# EAGLE board Qwiic_Spectral_Sensor_AS7341-Panel (EAGLE 9.6.2), part 1 of 3
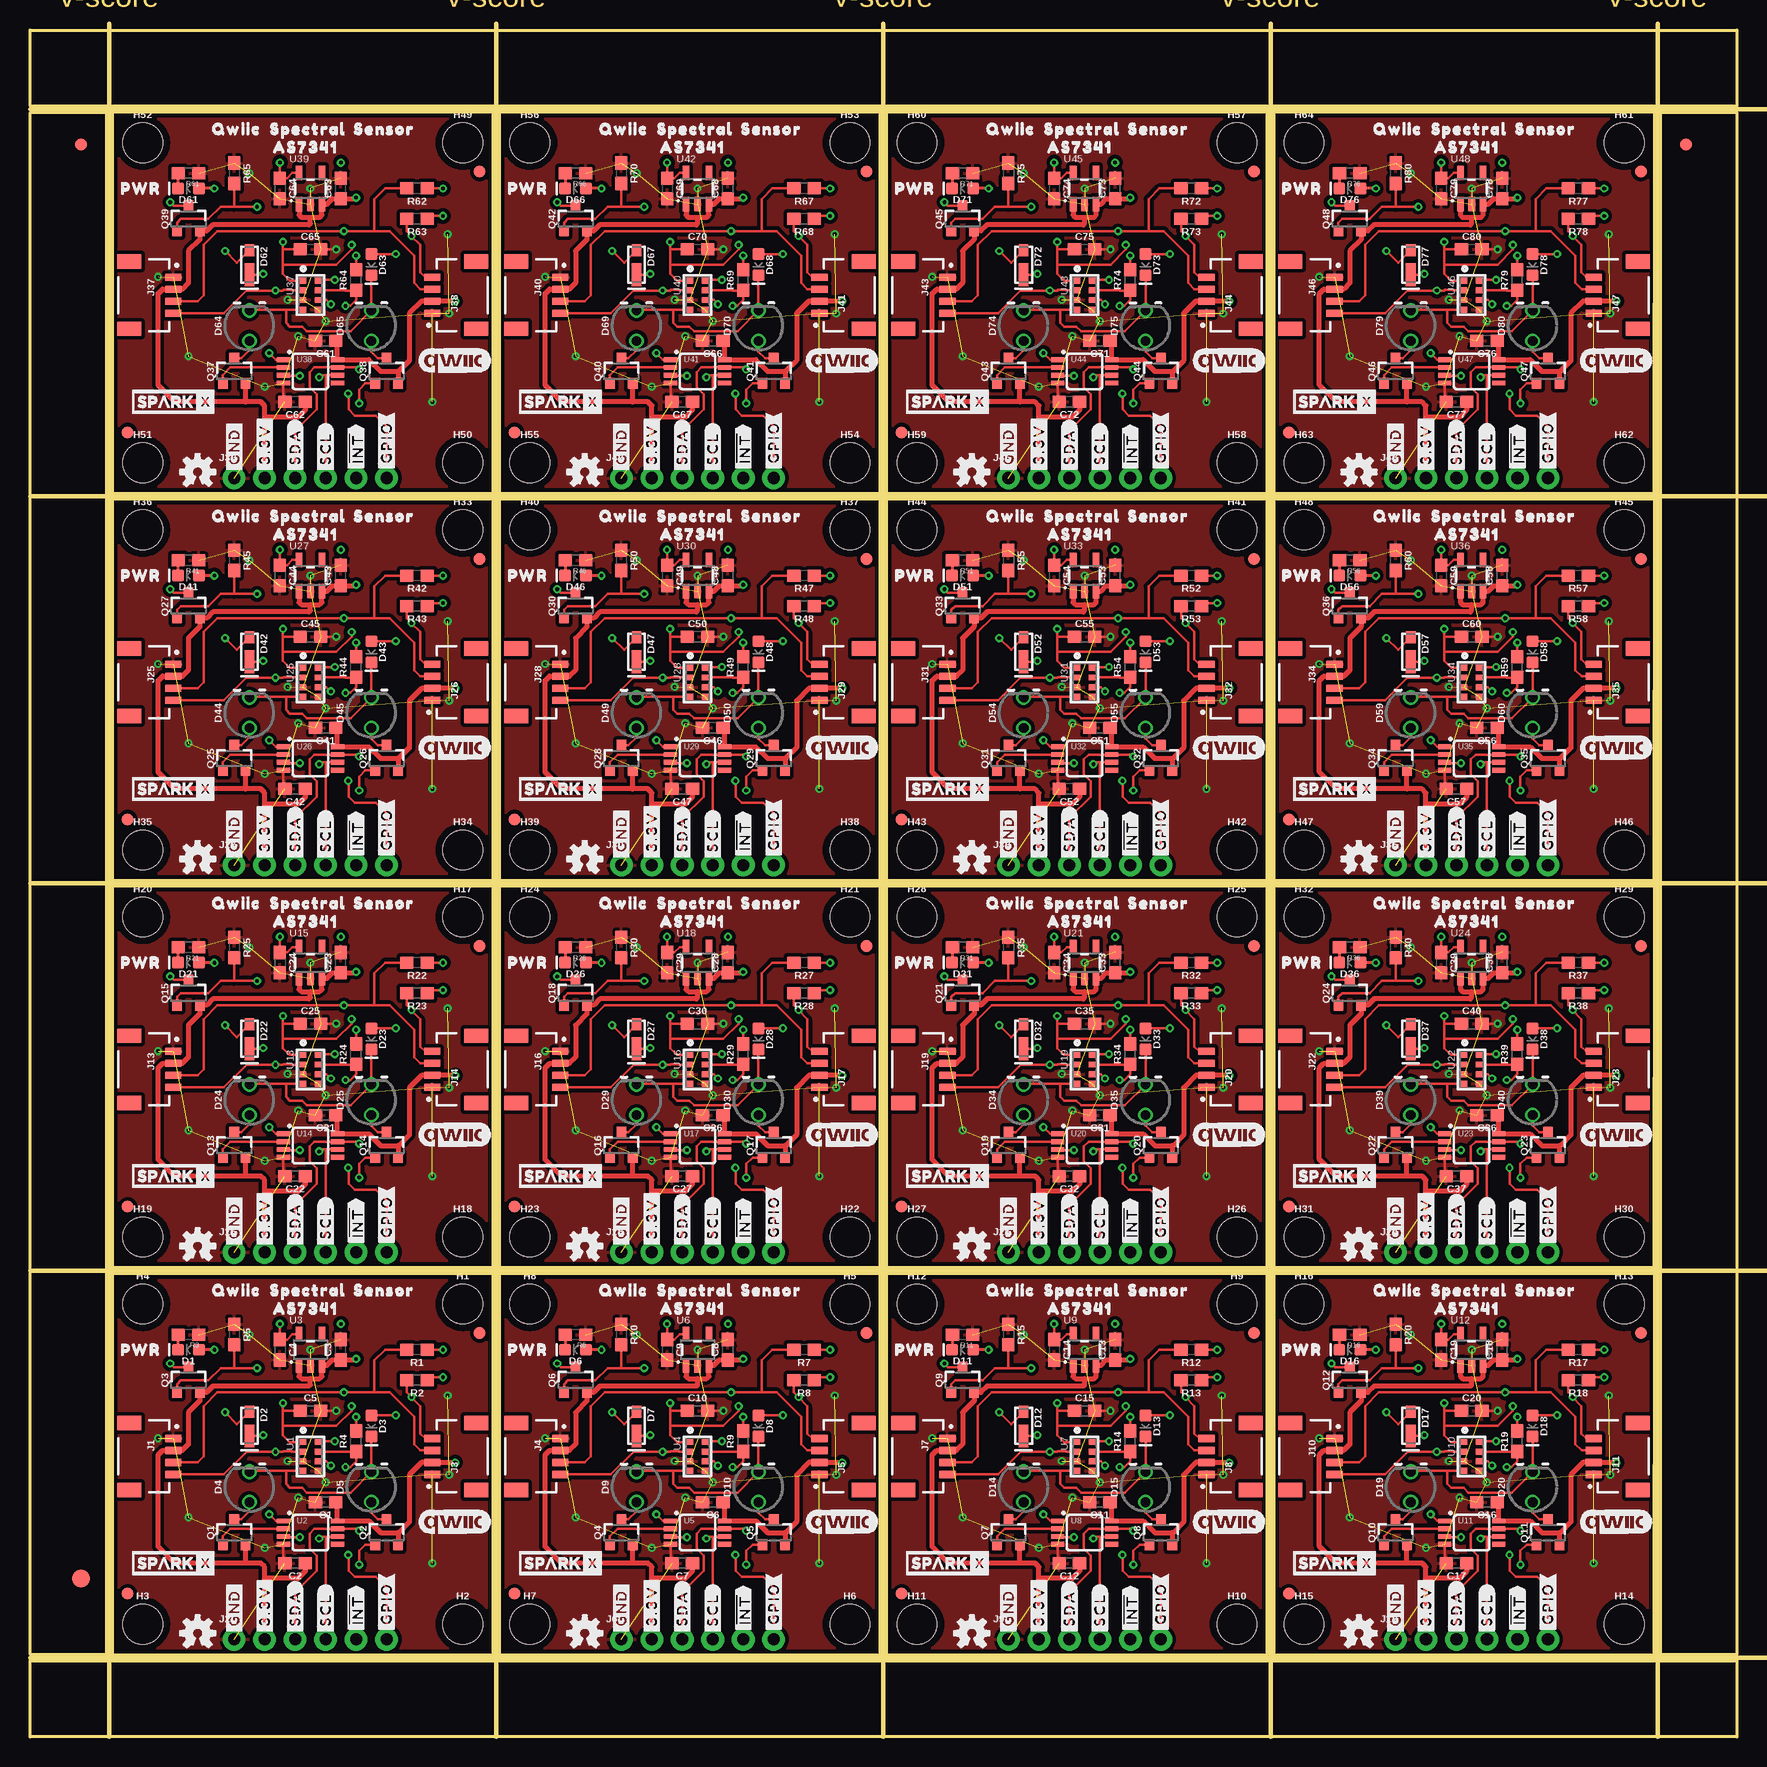
[diagram p0: board, top side]
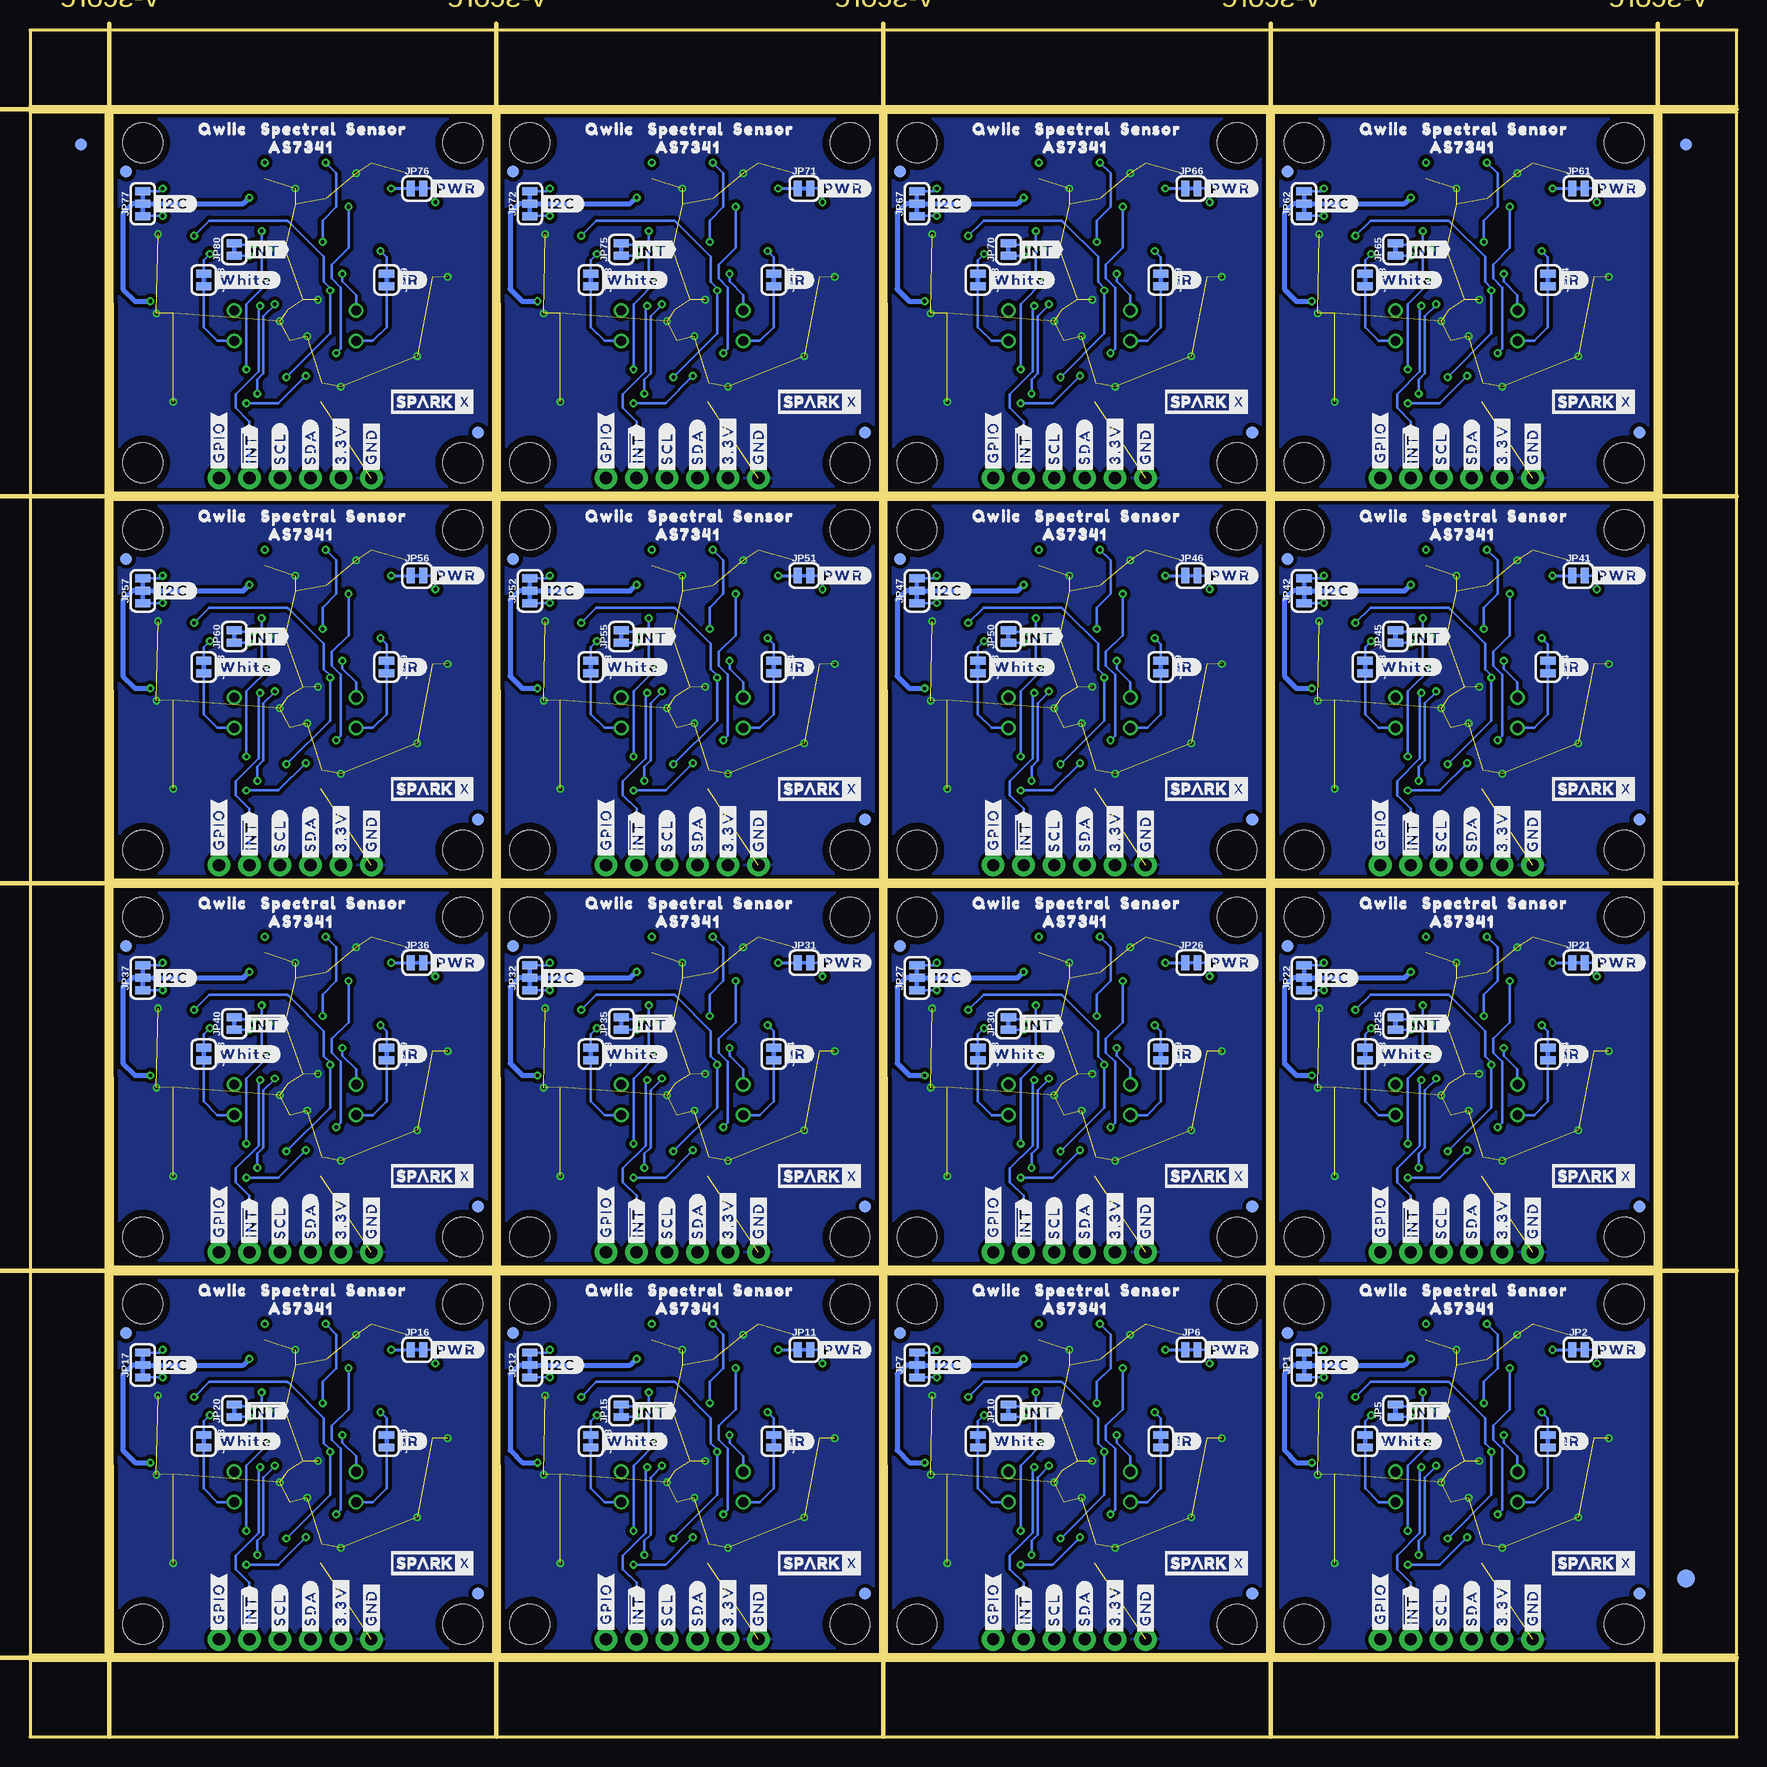
[diagram p1: board, bottom side, seen from below]

Size 142.24 x 142.24 mm. Coordinates in mm from the lower left corner, seen from the top.
Outline: 6.86,6.86 38.59,6.86 38.61,38.61 6.86,38.61 6.86,6.86
Outline: 39.12,6.86 70.85,6.86 70.87,38.61 39.12,38.61 39.12,6.86
Outline: 71.37,6.86 103.1,6.86 103.12,38.61 71.37,38.61 71.37,6.86
Outline: 103.63,6.86 135.36,6.86 135.38,38.61 103.63,38.61 103.63,6.86
Outline: 6.86,39.12 38.59,39.12 38.61,70.87 6.86,70.87 6.86,39.12
Outline: 39.12,39.12 70.85,39.12 70.87,70.87 39.12,70.87 39.12,39.12
Outline: 71.37,39.12 103.1,39.12 103.12,70.87 71.37,70.87 71.37,39.12
Outline: 103.63,39.12 135.36,39.12 135.38,70.87 103.63,70.87 103.63,39.12
Outline: 6.86,71.37 38.59,71.37 38.61,103.12 6.86,103.12 6.86,71.37
Outline: 39.12,71.37 70.85,71.37 70.87,103.12 39.12,103.12 39.12,71.37
Outline: 71.37,71.37 103.1,71.37 103.12,103.12 71.37,103.12 71.37,71.37
Outline: 103.63,71.37 135.36,71.37 135.38,103.12 103.63,103.12 103.63,71.37
Outline: 6.86,103.63 38.59,103.63 38.61,135.38 6.86,135.38 6.86,103.63
Outline: 39.12,103.63 70.85,103.63 70.87,135.38 39.12,135.38 39.12,103.63
Outline: 71.37,103.63 103.1,103.63 103.12,135.38 71.37,135.38 71.37,103.63
Outline: 103.63,103.63 135.36,103.63 135.38,135.38 103.63,135.38 103.63,103.63
Outline: 0,6.35 142.24,6.35 142.24,0 0,0 0,6.35
Outline: 135.89,135.38 142.24,135.38 142.24,6.86 135.89,6.86 135.89,135.38
Outline: 0,142.24 142.24,142.24 142.24,135.89 0,135.89 0,142.24
Outline: 0,135.38 6.35,135.38 6.35,6.86 0,6.86 0,135.38
Copper layers (1*16): Top 0.035mm / dielectric 1.5mm / Bottom 0.035mm
Design rules "Qwiic_Spectral_Sensor_AS7341": minimum track width 7mil, minimum drill 12mil, track to track 7mil, track to pad 7mil, pad to pad 7mil, via to via 7mil, smd to smd 7mil, copper to edge 7mil, drill to drill 7mil, minimum pad ring 7mil, minimum via ring 7mil, stop-mask expansion 4mil, vias tented up to drill 25mil, thermal gap 10mil
Milling: 10 lines

## Footprints (pad centres in the part's own frame; a part is rotated, then mirrored left to right if it is on the bottom)
0603 = smd 1.1 x 1: 1 -0.85,0; 2 0.85,0
LED-0603 = smd 1 x 1: A -0.877,0; C 0.877,0
SUPER_BRIGHT_SMD_LED_3014 = smd 1 x 0.8: A -1.2,0 | smd 1.9 x 0.8: C 0.827,0
LED_3MM-NS = drill 0.813: A -1.27,0; K 1.27,0
FIDUCIAL-1X2 = smd 1 x 1: 1 0,0
FIDUCIAL-1.5X3 = smd 1.5 x 1.5: 1 0,0
STAND-OFF = hole 3.302: 0,0
JST04_1MM_RA = smd 0.6 x 1.35: 1 -1.5,0; 2 -0.5,0; 3 0.5,0; 4 1.5,0 | smd 1.2 x 2: NC1 2.8,-3.675; NC2 -2.8,-3.675
1X06_NO_SILK = drill 1.016 pad 1.88: 1 0,0; 2 2.54,0; 3 5.08,0; 4 7.62,0; 5 10.16,0; 6 12.7,0
SMT-JUMPER_3_2-NC_TRACE_SILK = smd 0.66 x 1.27: 1 -1.041,0; 2 0,0; 3 1.041,0
SMT-JUMPER_2_NC_TRACE_SILK = smd 0.66 x 1.27: 1 -0.521,0; 2 0.521,0
SOT23-3 = smd 0.8 x 0.9: 1 -0.95,-1; 2 0.95,-1; 3 0,1.1
OLGA8 = smd 0.488 x 0.575: 1 -1.2,-0.638; 2 -0.4,-0.638; 3 0.4,-0.638; 4 1.2,-0.638; 5 1.2,0.638; 6 0.4,0.638; 7 -0.4,0.638; 8 -1.2,0.638
MSOP8 = smd 1.1 x 0.4: 1 -2.25,0.975; 2 -2.25,0.325; 3 -2.25,-0.325; 4 -2.25,-0.975; 5 2.25,-0.975; 6 2.25,-0.325; 7 2.25,0.325; 8 2.25,0.975
SOT23-5 = smd 0.55 x 1.2: 1 -0.95,-1.3; 2 0,-1.3; 3 0.95,-1.3; 4 0.95,1.3; 5 -0.95,1.3

## Placement (x,y rotation side)
C1  10uF  [0603]  24.64,19.56 180 top
C2  0.1uF  [0603]  22.1,14.48 180 top
C3  1.0uF  [0603]  25.91,32.26 90 top
C4  1.0uF  [0603]  20.83,32.26 270 top
C5  0.1uF  [0603]  23.37,27.18 0 top
C6  10uF  [0603]  56.9,19.56 180 top
C7  0.1uF  [0603]  54.36,14.48 180 top
C8  1.0uF  [0603]  58.17,32.26 90 top
C9  1.0uF  [0603]  53.09,32.26 270 top
C10  0.1uF  [0603]  55.63,27.18 0 top
C11  10uF  [0603]  89.15,19.56 180 top
C12  0.1uF  [0603]  86.61,14.48 180 top
C13  1.0uF  [0603]  90.42,32.26 90 top
C14  1.0uF  [0603]  85.34,32.26 270 top
C15  0.1uF  [0603]  87.88,27.18 0 top
C16  10uF  [0603]  121.41,19.56 180 top
C17  0.1uF  [0603]  118.87,14.48 180 top
C18  1.0uF  [0603]  122.68,32.26 90 top
C19  1.0uF  [0603]  117.6,32.26 270 top
C20  0.1uF  [0603]  120.14,27.18 0 top
C21  10uF  [0603]  24.64,51.82 180 top
C22  0.1uF  [0603]  22.1,46.74 180 top
C23  1.0uF  [0603]  25.91,64.52 90 top
C24  1.0uF  [0603]  20.83,64.52 270 top
C25  0.1uF  [0603]  23.37,59.44 0 top
C26  10uF  [0603]  56.9,51.82 180 top
C27  0.1uF  [0603]  54.36,46.74 180 top
C28  1.0uF  [0603]  58.17,64.52 90 top
C29  1.0uF  [0603]  53.09,64.52 270 top
C30  0.1uF  [0603]  55.63,59.44 0 top
C31  10uF  [0603]  89.15,51.82 180 top
C32  0.1uF  [0603]  86.61,46.74 180 top
C33  1.0uF  [0603]  90.42,64.52 90 top
C34  1.0uF  [0603]  85.34,64.52 270 top
C35  0.1uF  [0603]  87.88,59.44 0 top
C36  10uF  [0603]  121.41,51.82 180 top
C37  0.1uF  [0603]  118.87,46.74 180 top
C38  1.0uF  [0603]  122.68,64.52 90 top
C39  1.0uF  [0603]  117.6,64.52 270 top
C40  0.1uF  [0603]  120.14,59.44 0 top
C41  10uF  [0603]  24.64,84.07 180 top
C42  0.1uF  [0603]  22.1,78.99 180 top
C43  1.0uF  [0603]  25.91,96.77 90 top
C44  1.0uF  [0603]  20.83,96.77 270 top
C45  0.1uF  [0603]  23.37,91.69 0 top
C46  10uF  [0603]  56.9,84.07 180 top
C47  0.1uF  [0603]  54.36,78.99 180 top
C48  1.0uF  [0603]  58.17,96.77 90 top
C49  1.0uF  [0603]  53.09,96.77 270 top
C50  0.1uF  [0603]  55.63,91.69 0 top
C51  10uF  [0603]  89.15,84.07 180 top
C52  0.1uF  [0603]  86.61,78.99 180 top
C53  1.0uF  [0603]  90.42,96.77 90 top
C54  1.0uF  [0603]  85.34,96.77 270 top
C55  0.1uF  [0603]  87.88,91.69 0 top
C56  10uF  [0603]  121.41,84.07 180 top
C57  0.1uF  [0603]  118.87,78.99 180 top
C58  1.0uF  [0603]  122.68,96.77 90 top
C59  1.0uF  [0603]  117.6,96.77 270 top
C60  0.1uF  [0603]  120.14,91.69 0 top
C61  10uF  [0603]  24.64,116.33 180 top
C62  0.1uF  [0603]  22.1,111.25 180 top
C63  1.0uF  [0603]  25.91,129.03 90 top
C64  1.0uF  [0603]  20.83,129.03 270 top
C65  0.1uF  [0603]  23.37,123.95 0 top
C66  10uF  [0603]  56.9,116.33 180 top
C67  0.1uF  [0603]  54.36,111.25 180 top
C68  1.0uF  [0603]  58.17,129.03 90 top
C69  1.0uF  [0603]  53.09,129.03 270 top
C70  0.1uF  [0603]  55.63,123.95 0 top
C71  10uF  [0603]  89.15,116.33 180 top
C72  0.1uF  [0603]  86.61,111.25 180 top
C73  1.0uF  [0603]  90.42,129.03 90 top
C74  1.0uF  [0603]  85.34,129.03 270 top
C75  0.1uF  [0603]  87.88,123.95 0 top
C76  10uF  [0603]  121.41,116.33 180 top
C77  0.1uF  [0603]  118.87,111.25 180 top
C78  1.0uF  [0603]  122.68,129.03 90 top
C79  1.0uF  [0603]  117.6,129.03 270 top
C80  0.1uF  [0603]  120.14,123.95 0 top
D1  RED  [LED-0603]  13.21,32.26 180 top
D2  White, 60mA  [SUPER_BRIGHT_SMD_LED_3014]  18.29,25.91 270 top
D3  LED-IR0603  [LED-0603]  28.45,25.91 270 top
D4  [LED_3MM-NS]  18.29,20.83 90 top
D5  [LED_3MM-NS]  28.45,20.83 90 top
D6  RED  [LED-0603]  45.47,32.26 180 top
D7  White, 60mA  [SUPER_BRIGHT_SMD_LED_3014]  50.55,25.91 270 top
D8  LED-IR0603  [LED-0603]  60.71,25.91 270 top
D9  [LED_3MM-NS]  50.55,20.83 90 top
D10  [LED_3MM-NS]  60.71,20.83 90 top
D11  RED  [LED-0603]  77.72,32.26 180 top
D12  White, 60mA  [SUPER_BRIGHT_SMD_LED_3014]  82.8,25.91 270 top
D13  LED-IR0603  [LED-0603]  92.96,25.91 270 top
D14  [LED_3MM-NS]  82.8,20.83 90 top
D15  [LED_3MM-NS]  92.96,20.83 90 top
D16  RED  [LED-0603]  109.98,32.26 180 top
D17  White, 60mA  [SUPER_BRIGHT_SMD_LED_3014]  115.06,25.91 270 top
D18  LED-IR0603  [LED-0603]  125.22,25.91 270 top
D19  [LED_3MM-NS]  115.06,20.83 90 top
D20  [LED_3MM-NS]  125.22,20.83 90 top
D21  RED  [LED-0603]  13.21,64.52 180 top
D22  White, 60mA  [SUPER_BRIGHT_SMD_LED_3014]  18.29,58.17 270 top
D23  LED-IR0603  [LED-0603]  28.45,58.17 270 top
D24  [LED_3MM-NS]  18.29,53.09 90 top
D25  [LED_3MM-NS]  28.45,53.09 90 top
D26  RED  [LED-0603]  45.47,64.52 180 top
D27  White, 60mA  [SUPER_BRIGHT_SMD_LED_3014]  50.55,58.17 270 top
D28  LED-IR0603  [LED-0603]  60.71,58.17 270 top
D29  [LED_3MM-NS]  50.55,53.09 90 top
D30  [LED_3MM-NS]  60.71,53.09 90 top
D31  RED  [LED-0603]  77.72,64.52 180 top
D32  White, 60mA  [SUPER_BRIGHT_SMD_LED_3014]  82.8,58.17 270 top
D33  LED-IR0603  [LED-0603]  92.96,58.17 270 top
D34  [LED_3MM-NS]  82.8,53.09 90 top
D35  [LED_3MM-NS]  92.96,53.09 90 top
D36  RED  [LED-0603]  109.98,64.52 180 top
D37  White, 60mA  [SUPER_BRIGHT_SMD_LED_3014]  115.06,58.17 270 top
D38  LED-IR0603  [LED-0603]  125.22,58.17 270 top
D39  [LED_3MM-NS]  115.06,53.09 90 top
D40  [LED_3MM-NS]  125.22,53.09 90 top
D41  RED  [LED-0603]  13.21,96.77 180 top
D42  White, 60mA  [SUPER_BRIGHT_SMD_LED_3014]  18.29,90.42 270 top
D43  LED-IR0603  [LED-0603]  28.45,90.42 270 top
D44  [LED_3MM-NS]  18.29,85.34 90 top
D45  [LED_3MM-NS]  28.45,85.34 90 top
D46  RED  [LED-0603]  45.47,96.77 180 top
D47  White, 60mA  [SUPER_BRIGHT_SMD_LED_3014]  50.55,90.42 270 top
D48  LED-IR0603  [LED-0603]  60.71,90.42 270 top
D49  [LED_3MM-NS]  50.55,85.34 90 top
D50  [LED_3MM-NS]  60.71,85.34 90 top
D51  RED  [LED-0603]  77.72,96.77 180 top
D52  White, 60mA  [SUPER_BRIGHT_SMD_LED_3014]  82.8,90.42 270 top
D53  LED-IR0603  [LED-0603]  92.96,90.42 270 top
D54  [LED_3MM-NS]  82.8,85.34 90 top
D55  [LED_3MM-NS]  92.96,85.34 90 top
D56  RED  [LED-0603]  109.98,96.77 180 top
D57  White, 60mA  [SUPER_BRIGHT_SMD_LED_3014]  115.06,90.42 270 top
D58  LED-IR0603  [LED-0603]  125.22,90.42 270 top
D59  [LED_3MM-NS]  115.06,85.34 90 top
D60  [LED_3MM-NS]  125.22,85.34 90 top
D61  RED  [LED-0603]  13.21,129.03 180 top
D62  White, 60mA  [SUPER_BRIGHT_SMD_LED_3014]  18.29,122.68 270 top
D63  LED-IR0603  [LED-0603]  28.45,122.68 270 top
D64  [LED_3MM-NS]  18.29,117.6 90 top
D65  [LED_3MM-NS]  28.45,117.6 90 top
D66  RED  [LED-0603]  45.47,129.03 180 top
D67  White, 60mA  [SUPER_BRIGHT_SMD_LED_3014]  50.55,122.68 270 top
D68  LED-IR0603  [LED-0603]  60.71,122.68 270 top
D69  [LED_3MM-NS]  50.55,117.6 90 top
D70  [LED_3MM-NS]  60.71,117.6 90 top
D71  RED  [LED-0603]  77.72,129.03 180 top
D72  White, 60mA  [SUPER_BRIGHT_SMD_LED_3014]  82.8,122.68 270 top
D73  LED-IR0603  [LED-0603]  92.96,122.68 270 top
D74  [LED_3MM-NS]  82.8,117.6 90 top
D75  [LED_3MM-NS]  92.96,117.6 90 top
D76  RED  [LED-0603]  109.98,129.03 180 top
D77  White, 60mA  [SUPER_BRIGHT_SMD_LED_3014]  115.06,122.68 270 top
D78  LED-IR0603  [LED-0603]  125.22,122.68 270 top
D79  [LED_3MM-NS]  115.06,117.6 90 top
D80  [LED_3MM-NS]  125.22,117.6 90 top
E$1  [FIDUCIAL-1X2]  4.23,132.72 0 top
E$2  [FIDUCIAL-1X2]  4.23,132.72 0 bottom
E$3  [FIDUCIAL-1X2]  138.01,132.72 0 top
E$4  [FIDUCIAL-1X2]  138.01,132.72 0 bottom
E$5  [FIDUCIAL-1.5X3]  4.23,13.21 0 top
E$6  [FIDUCIAL-1.5X3]  4.23,13.21 0 bottom
FD1  FIDUCIAL1X2  [FIDUCIAL-1X2]  8.13,11.94 0 top
FD2  FIDUCIAL1X2  [FIDUCIAL-1X2]  37.46,33.66 0 top
FD3  FIDUCIAL1X2  [FIDUCIAL-1X2]  8.13,11.94 0 bottom
FD4  FIDUCIAL1X2  [FIDUCIAL-1X2]  37.46,33.66 0 bottom
FD5  FIDUCIAL1X2  [FIDUCIAL-1X2]  40.39,11.94 0 top
FD6  FIDUCIAL1X2  [FIDUCIAL-1X2]  69.72,33.66 0 top
FD7  FIDUCIAL1X2  [FIDUCIAL-1X2]  40.39,11.94 0 bottom
FD8  FIDUCIAL1X2  [FIDUCIAL-1X2]  69.72,33.66 0 bottom
FD9  FIDUCIAL1X2  [FIDUCIAL-1X2]  72.64,11.94 0 top
FD10  FIDUCIAL1X2  [FIDUCIAL-1X2]  101.98,33.66 0 top
FD11  FIDUCIAL1X2  [FIDUCIAL-1X2]  72.64,11.94 0 bottom
FD12  FIDUCIAL1X2  [FIDUCIAL-1X2]  101.98,33.66 0 bottom
FD13  FIDUCIAL1X2  [FIDUCIAL-1X2]  104.9,11.94 0 top
FD14  FIDUCIAL1X2  [FIDUCIAL-1X2]  134.24,33.66 0 top
FD15  FIDUCIAL1X2  [FIDUCIAL-1X2]  104.9,11.94 0 bottom
FD16  FIDUCIAL1X2  [FIDUCIAL-1X2]  134.24,33.66 0 bottom
FD17  FIDUCIAL1X2  [FIDUCIAL-1X2]  8.13,44.2 0 top
FD18  FIDUCIAL1X2  [FIDUCIAL-1X2]  37.46,65.91 0 top
FD19  FIDUCIAL1X2  [FIDUCIAL-1X2]  8.13,44.2 0 bottom
FD20  FIDUCIAL1X2  [FIDUCIAL-1X2]  37.46,65.91 0 bottom
FD21  FIDUCIAL1X2  [FIDUCIAL-1X2]  40.39,44.2 0 top
FD22  FIDUCIAL1X2  [FIDUCIAL-1X2]  69.72,65.91 0 top
FD23  FIDUCIAL1X2  [FIDUCIAL-1X2]  40.39,44.2 0 bottom
FD24  FIDUCIAL1X2  [FIDUCIAL-1X2]  69.72,65.91 0 bottom
FD25  FIDUCIAL1X2  [FIDUCIAL-1X2]  72.64,44.2 0 top
FD26  FIDUCIAL1X2  [FIDUCIAL-1X2]  101.98,65.91 0 top
FD27  FIDUCIAL1X2  [FIDUCIAL-1X2]  72.64,44.2 0 bottom
FD28  FIDUCIAL1X2  [FIDUCIAL-1X2]  101.98,65.91 0 bottom
FD29  FIDUCIAL1X2  [FIDUCIAL-1X2]  104.9,44.2 0 top
FD30  FIDUCIAL1X2  [FIDUCIAL-1X2]  134.24,65.91 0 top
FD31  FIDUCIAL1X2  [FIDUCIAL-1X2]  104.9,44.2 0 bottom
FD32  FIDUCIAL1X2  [FIDUCIAL-1X2]  134.24,65.91 0 bottom
FD33  FIDUCIAL1X2  [FIDUCIAL-1X2]  8.13,76.45 0 top
FD34  FIDUCIAL1X2  [FIDUCIAL-1X2]  37.46,98.17 0 top
FD35  FIDUCIAL1X2  [FIDUCIAL-1X2]  8.13,76.45 0 bottom
FD36  FIDUCIAL1X2  [FIDUCIAL-1X2]  37.46,98.17 0 bottom
FD37  FIDUCIAL1X2  [FIDUCIAL-1X2]  40.39,76.45 0 top
FD38  FIDUCIAL1X2  [FIDUCIAL-1X2]  69.72,98.17 0 top
FD39  FIDUCIAL1X2  [FIDUCIAL-1X2]  40.39,76.45 0 bottom
FD40  FIDUCIAL1X2  [FIDUCIAL-1X2]  69.72,98.17 0 bottom
FD41  FIDUCIAL1X2  [FIDUCIAL-1X2]  72.64,76.45 0 top
FD42  FIDUCIAL1X2  [FIDUCIAL-1X2]  101.98,98.17 0 top
FD43  FIDUCIAL1X2  [FIDUCIAL-1X2]  72.64,76.45 0 bottom
FD44  FIDUCIAL1X2  [FIDUCIAL-1X2]  101.98,98.17 0 bottom
FD45  FIDUCIAL1X2  [FIDUCIAL-1X2]  104.9,76.45 0 top
FD46  FIDUCIAL1X2  [FIDUCIAL-1X2]  134.24,98.17 0 top
FD47  FIDUCIAL1X2  [FIDUCIAL-1X2]  104.9,76.45 0 bottom
FD48  FIDUCIAL1X2  [FIDUCIAL-1X2]  134.24,98.17 0 bottom
FD49  FIDUCIAL1X2  [FIDUCIAL-1X2]  8.13,108.71 0 top
FD50  FIDUCIAL1X2  [FIDUCIAL-1X2]  37.46,130.43 0 top
FD51  FIDUCIAL1X2  [FIDUCIAL-1X2]  8.13,108.71 0 bottom
FD52  FIDUCIAL1X2  [FIDUCIAL-1X2]  37.46,130.43 0 bottom
FD53  FIDUCIAL1X2  [FIDUCIAL-1X2]  40.39,108.71 0 top
FD54  FIDUCIAL1X2  [FIDUCIAL-1X2]  69.72,130.43 0 top
FD55  FIDUCIAL1X2  [FIDUCIAL-1X2]  40.39,108.71 0 bottom
FD56  FIDUCIAL1X2  [FIDUCIAL-1X2]  69.72,130.43 0 bottom
FD57  FIDUCIAL1X2  [FIDUCIAL-1X2]  72.64,108.71 0 top
FD58  FIDUCIAL1X2  [FIDUCIAL-1X2]  101.98,130.43 0 top
FD59  FIDUCIAL1X2  [FIDUCIAL-1X2]  72.64,108.71 0 bottom
FD60  FIDUCIAL1X2  [FIDUCIAL-1X2]  101.98,130.43 0 bottom
FD61  FIDUCIAL1X2  [FIDUCIAL-1X2]  104.9,108.71 0 top
FD62  FIDUCIAL1X2  [FIDUCIAL-1X2]  134.24,130.43 0 top
FD63  FIDUCIAL1X2  [FIDUCIAL-1X2]  104.9,108.71 0 bottom
FD64  FIDUCIAL1X2  [FIDUCIAL-1X2]  134.24,130.43 0 bottom
H1  STAND-OFF  [STAND-OFF]  36.07,36.07 0 top
H2  STAND-OFF  [STAND-OFF]  36.07,9.4 0 top
H3  STAND-OFF  [STAND-OFF]  9.4,9.4 0 top
H4  STAND-OFF  [STAND-OFF]  9.4,36.07 0 top
H5  STAND-OFF  [STAND-OFF]  68.33,36.07 0 top
H6  STAND-OFF  [STAND-OFF]  68.33,9.4 0 top
H7  STAND-OFF  [STAND-OFF]  41.66,9.4 0 top
H8  STAND-OFF  [STAND-OFF]  41.66,36.07 0 top
H9  STAND-OFF  [STAND-OFF]  100.58,36.07 0 top
H10  STAND-OFF  [STAND-OFF]  100.58,9.4 0 top
H11  STAND-OFF  [STAND-OFF]  73.91,9.4 0 top
H12  STAND-OFF  [STAND-OFF]  73.91,36.07 0 top
H13  STAND-OFF  [STAND-OFF]  132.84,36.07 0 top
H14  STAND-OFF  [STAND-OFF]  132.84,9.4 0 top
H15  STAND-OFF  [STAND-OFF]  106.17,9.4 0 top
H16  STAND-OFF  [STAND-OFF]  106.17,36.07 0 top
H17  STAND-OFF  [STAND-OFF]  36.07,68.33 0 top
H18  STAND-OFF  [STAND-OFF]  36.07,41.66 0 top
H19  STAND-OFF  [STAND-OFF]  9.4,41.66 0 top
H20  STAND-OFF  [STAND-OFF]  9.4,68.33 0 top
H21  STAND-OFF  [STAND-OFF]  68.33,68.33 0 top
H22  STAND-OFF  [STAND-OFF]  68.33,41.66 0 top
H23  STAND-OFF  [STAND-OFF]  41.66,41.66 0 top
H24  STAND-OFF  [STAND-OFF]  41.66,68.33 0 top
H25  STAND-OFF  [STAND-OFF]  100.58,68.33 0 top
H26  STAND-OFF  [STAND-OFF]  100.58,41.66 0 top
H27  STAND-OFF  [STAND-OFF]  73.91,41.66 0 top
H28  STAND-OFF  [STAND-OFF]  73.91,68.33 0 top
H29  STAND-OFF  [STAND-OFF]  132.84,68.33 0 top
H30  STAND-OFF  [STAND-OFF]  132.84,41.66 0 top
H31  STAND-OFF  [STAND-OFF]  106.17,41.66 0 top
H32  STAND-OFF  [STAND-OFF]  106.17,68.33 0 top
H33  STAND-OFF  [STAND-OFF]  36.07,100.58 0 top
H34  STAND-OFF  [STAND-OFF]  36.07,73.91 0 top
H35  STAND-OFF  [STAND-OFF]  9.4,73.91 0 top
H36  STAND-OFF  [STAND-OFF]  9.4,100.58 0 top
H37  STAND-OFF  [STAND-OFF]  68.33,100.58 0 top
H38  STAND-OFF  [STAND-OFF]  68.33,73.91 0 top
H39  STAND-OFF  [STAND-OFF]  41.66,73.91 0 top
H40  STAND-OFF  [STAND-OFF]  41.66,100.58 0 top
H41  STAND-OFF  [STAND-OFF]  100.58,100.58 0 top
H42  STAND-OFF  [STAND-OFF]  100.58,73.91 0 top
H43  STAND-OFF  [STAND-OFF]  73.91,73.91 0 top
H44  STAND-OFF  [STAND-OFF]  73.91,100.58 0 top
H45  STAND-OFF  [STAND-OFF]  132.84,100.58 0 top
H46  STAND-OFF  [STAND-OFF]  132.84,73.91 0 top
H47  STAND-OFF  [STAND-OFF]  106.17,73.91 0 top
H48  STAND-OFF  [STAND-OFF]  106.17,100.58 0 top
H49  STAND-OFF  [STAND-OFF]  36.07,132.84 0 top
H50  STAND-OFF  [STAND-OFF]  36.07,106.17 0 top
H51  STAND-OFF  [STAND-OFF]  9.4,106.17 0 top
H52  STAND-OFF  [STAND-OFF]  9.4,132.84 0 top
H53  STAND-OFF  [STAND-OFF]  68.33,132.84 0 top
H54  STAND-OFF  [STAND-OFF]  68.33,106.17 0 top
H55  STAND-OFF  [STAND-OFF]  41.66,106.17 0 top
H56  STAND-OFF  [STAND-OFF]  41.66,132.84 0 top
H57  STAND-OFF  [STAND-OFF]  100.58,132.84 0 top
H58  STAND-OFF  [STAND-OFF]  100.58,106.17 0 top
H59  STAND-OFF  [STAND-OFF]  73.91,106.17 0 top
H60  STAND-OFF  [STAND-OFF]  73.91,132.84 0 top
H61  STAND-OFF  [STAND-OFF]  132.84,132.84 0 top
H62  STAND-OFF  [STAND-OFF]  132.84,106.17 0 top
H63  STAND-OFF  [STAND-OFF]  106.17,106.17 0 top
H64  STAND-OFF  [STAND-OFF]  106.17,132.84 0 top
J1  QWIIC_RIGHT_ANGLE  [JST04_1MM_RA]  11.94,23.37 270 top
J2  [1X06_NO_SILK]  17.02,8.13 0 top
J3  QWIIC_RIGHT_ANGLE  [JST04_1MM_RA]  33.53,23.37 90 top
J4  QWIIC_RIGHT_ANGLE  [JST04_1MM_RA]  44.2,23.37 270 top
J5  QWIIC_RIGHT_ANGLE  [JST04_1MM_RA]  65.79,23.37 90 top
J6  [1X06_NO_SILK]  49.28,8.13 0 top
J7  QWIIC_RIGHT_ANGLE  [JST04_1MM_RA]  76.45,23.37 270 top
J8  QWIIC_RIGHT_ANGLE  [JST04_1MM_RA]  98.04,23.37 90 top
J9  [1X06_NO_SILK]  81.53,8.13 0 top
J10  QWIIC_RIGHT_ANGLE  [JST04_1MM_RA]  108.71,23.37 270 top
J11  QWIIC_RIGHT_ANGLE  [JST04_1MM_RA]  130.3,23.37 90 top
J12  [1X06_NO_SILK]  113.79,8.13 0 top
J13  QWIIC_RIGHT_ANGLE  [JST04_1MM_RA]  11.94,55.63 270 top
J14  QWIIC_RIGHT_ANGLE  [JST04_1MM_RA]  33.53,55.63 90 top
J15  [1X06_NO_SILK]  17.02,40.39 0 top
J16  QWIIC_RIGHT_ANGLE  [JST04_1MM_RA]  44.2,55.63 270 top
J17  QWIIC_RIGHT_ANGLE  [JST04_1MM_RA]  65.79,55.63 90 top
J18  [1X06_NO_SILK]  49.28,40.39 0 top
J19  QWIIC_RIGHT_ANGLE  [JST04_1MM_RA]  76.45,55.63 270 top
J20  QWIIC_RIGHT_ANGLE  [JST04_1MM_RA]  98.04,55.63 90 top
J21  [1X06_NO_SILK]  81.53,40.39 0 top
J22  QWIIC_RIGHT_ANGLE  [JST04_1MM_RA]  108.71,55.63 270 top
J23  QWIIC_RIGHT_ANGLE  [JST04_1MM_RA]  130.3,55.63 90 top
J24  [1X06_NO_SILK]  113.79,40.39 0 top
J25  QWIIC_RIGHT_ANGLE  [JST04_1MM_RA]  11.94,87.88 270 top
J26  QWIIC_RIGHT_ANGLE  [JST04_1MM_RA]  33.53,87.88 90 top
J27  [1X06_NO_SILK]  17.02,72.64 0 top
J28  QWIIC_RIGHT_ANGLE  [JST04_1MM_RA]  44.2,87.88 270 top
J29  QWIIC_RIGHT_ANGLE  [JST04_1MM_RA]  65.79,87.88 90 top
J30  [1X06_NO_SILK]  49.28,72.64 0 top
J31  QWIIC_RIGHT_ANGLE  [JST04_1MM_RA]  76.45,87.88 270 top
J32  QWIIC_RIGHT_ANGLE  [JST04_1MM_RA]  98.04,87.88 90 top
J33  [1X06_NO_SILK]  81.53,72.64 0 top
J34  QWIIC_RIGHT_ANGLE  [JST04_1MM_RA]  108.71,87.88 270 top
J35  QWIIC_RIGHT_ANGLE  [JST04_1MM_RA]  130.3,87.88 90 top
J36  [1X06_NO_SILK]  113.79,72.64 0 top
J37  QWIIC_RIGHT_ANGLE  [JST04_1MM_RA]  11.94,120.14 270 top
J38  QWIIC_RIGHT_ANGLE  [JST04_1MM_RA]  33.53,120.14 90 top
J39  [1X06_NO_SILK]  17.02,104.9 0 top
J40  QWIIC_RIGHT_ANGLE  [JST04_1MM_RA]  44.2,120.14 270 top
J41  QWIIC_RIGHT_ANGLE  [JST04_1MM_RA]  65.79,120.14 90 top
J42  [1X06_NO_SILK]  49.28,104.9 0 top
J43  QWIIC_RIGHT_ANGLE  [JST04_1MM_RA]  76.45,120.14 270 top
J44  QWIIC_RIGHT_ANGLE  [JST04_1MM_RA]  98.04,120.14 90 top
J45  [1X06_NO_SILK]  81.53,104.9 0 top
J46  QWIIC_RIGHT_ANGLE  [JST04_1MM_RA]  108.71,120.14 270 top
J47  QWIIC_RIGHT_ANGLE  [JST04_1MM_RA]  130.3,120.14 90 top
J48  [1X06_NO_SILK]  113.79,104.9 0 top
JP1  JUMPER-SMT_3_2-NC_TRACE_SILK  [SMT-JUMPER_3_2-NC_TRACE_SILK]  36.07,30.99 90 bottom
JP2  JUMPER-SMT_2_NC_TRACE_SILK  [SMT-JUMPER_2_NC_TRACE_SILK]  13.21,32.26 0 bottom
JP3  JUMPER-SMT_2_NC_TRACE_SILK  [SMT-JUMPER_2_NC_TRACE_SILK]  30.99,24.64 270 bottom
JP4  JUMPER-SMT_2_NC_TRACE_SILK  [SMT-JUMPER_2_NC_TRACE_SILK]  15.75,24.64 270 bottom
JP5  JUMPER-SMT_2_NC_TRACE_SILK  [SMT-JUMPER_2_NC_TRACE_SILK]  28.45,27.18 90 bottom
JP6  JUMPER-SMT_2_NC_TRACE_SILK  [SMT-JUMPER_2_NC_TRACE_SILK]  45.47,32.26 0 bottom
JP7  JUMPER-SMT_3_2-NC_TRACE_SILK  [SMT-JUMPER_3_2-NC_TRACE_SILK]  68.33,30.99 90 bottom
JP8  JUMPER-SMT_2_NC_TRACE_SILK  [SMT-JUMPER_2_NC_TRACE_SILK]  63.25,24.64 270 bottom
JP9  JUMPER-SMT_2_NC_TRACE_SILK  [SMT-JUMPER_2_NC_TRACE_SILK]  48.01,24.64 270 bottom
JP10  JUMPER-SMT_2_NC_TRACE_SILK  [SMT-JUMPER_2_NC_TRACE_SILK]  60.71,27.18 90 bottom
JP11  JUMPER-SMT_2_NC_TRACE_SILK  [SMT-JUMPER_2_NC_TRACE_SILK]  77.72,32.26 0 bottom
JP12  JUMPER-SMT_3_2-NC_TRACE_SILK  [SMT-JUMPER_3_2-NC_TRACE_SILK]  100.58,30.99 90 bottom
JP13  JUMPER-SMT_2_NC_TRACE_SILK  [SMT-JUMPER_2_NC_TRACE_SILK]  95.5,24.64 270 bottom
JP14  JUMPER-SMT_2_NC_TRACE_SILK  [SMT-JUMPER_2_NC_TRACE_SILK]  80.26,24.64 270 bottom
JP15  JUMPER-SMT_2_NC_TRACE_SILK  [SMT-JUMPER_2_NC_TRACE_SILK]  92.96,27.18 90 bottom
JP16  JUMPER-SMT_2_NC_TRACE_SILK  [SMT-JUMPER_2_NC_TRACE_SILK]  109.98,32.26 0 bottom
JP17  JUMPER-SMT_3_2-NC_TRACE_SILK  [SMT-JUMPER_3_2-NC_TRACE_SILK]  132.84,30.99 90 bottom
JP18  JUMPER-SMT_2_NC_TRACE_SILK  [SMT-JUMPER_2_NC_TRACE_SILK]  127.76,24.64 270 bottom
JP19  JUMPER-SMT_2_NC_TRACE_SILK  [SMT-JUMPER_2_NC_TRACE_SILK]  112.52,24.64 270 bottom
JP20  JUMPER-SMT_2_NC_TRACE_SILK  [SMT-JUMPER_2_NC_TRACE_SILK]  125.22,27.18 90 bottom
JP21  JUMPER-SMT_2_NC_TRACE_SILK  [SMT-JUMPER_2_NC_TRACE_SILK]  13.21,64.52 0 bottom
JP22  JUMPER-SMT_3_2-NC_TRACE_SILK  [SMT-JUMPER_3_2-NC_TRACE_SILK]  36.07,63.25 90 bottom
JP23  JUMPER-SMT_2_NC_TRACE_SILK  [SMT-JUMPER_2_NC_TRACE_SILK]  30.99,56.9 270 bottom
JP24  JUMPER-SMT_2_NC_TRACE_SILK  [SMT-JUMPER_2_NC_TRACE_SILK]  15.75,56.9 270 bottom
JP25  JUMPER-SMT_2_NC_TRACE_SILK  [SMT-JUMPER_2_NC_TRACE_SILK]  28.45,59.44 90 bottom
JP26  JUMPER-SMT_2_NC_TRACE_SILK  [SMT-JUMPER_2_NC_TRACE_SILK]  45.47,64.52 0 bottom
JP27  JUMPER-SMT_3_2-NC_TRACE_SILK  [SMT-JUMPER_3_2-NC_TRACE_SILK]  68.33,63.25 90 bottom
JP28  JUMPER-SMT_2_NC_TRACE_SILK  [SMT-JUMPER_2_NC_TRACE_SILK]  63.25,56.9 270 bottom
JP29  JUMPER-SMT_2_NC_TRACE_SILK  [SMT-JUMPER_2_NC_TRACE_SILK]  48.01,56.9 270 bottom
JP30  JUMPER-SMT_2_NC_TRACE_SILK  [SMT-JUMPER_2_NC_TRACE_SILK]  60.71,59.44 90 bottom
JP31  JUMPER-SMT_2_NC_TRACE_SILK  [SMT-JUMPER_2_NC_TRACE_SILK]  77.72,64.52 0 bottom
JP32  JUMPER-SMT_3_2-NC_TRACE_SILK  [SMT-JUMPER_3_2-NC_TRACE_SILK]  100.58,63.25 90 bottom
JP33  JUMPER-SMT_2_NC_TRACE_SILK  [SMT-JUMPER_2_NC_TRACE_SILK]  95.5,56.9 270 bottom
JP34  JUMPER-SMT_2_NC_TRACE_SILK  [SMT-JUMPER_2_NC_TRACE_SILK]  80.26,56.9 270 bottom
JP35  JUMPER-SMT_2_NC_TRACE_SILK  [SMT-JUMPER_2_NC_TRACE_SILK]  92.96,59.44 90 bottom
JP36  JUMPER-SMT_2_NC_TRACE_SILK  [SMT-JUMPER_2_NC_TRACE_SILK]  109.98,64.52 0 bottom
JP37  JUMPER-SMT_3_2-NC_TRACE_SILK  [SMT-JUMPER_3_2-NC_TRACE_SILK]  132.84,63.25 90 bottom
JP38  JUMPER-SMT_2_NC_TRACE_SILK  [SMT-JUMPER_2_NC_TRACE_SILK]  127.76,56.9 270 bottom
JP39  JUMPER-SMT_2_NC_TRACE_SILK  [SMT-JUMPER_2_NC_TRACE_SILK]  112.52,56.9 270 bottom
JP40  JUMPER-SMT_2_NC_TRACE_SILK  [SMT-JUMPER_2_NC_TRACE_SILK]  125.22,59.44 90 bottom
JP41  JUMPER-SMT_2_NC_TRACE_SILK  [SMT-JUMPER_2_NC_TRACE_SILK]  13.21,96.77 0 bottom
JP42  JUMPER-SMT_3_2-NC_TRACE_SILK  [SMT-JUMPER_3_2-NC_TRACE_SILK]  36.07,95.5 90 bottom
JP43  JUMPER-SMT_2_NC_TRACE_SILK  [SMT-JUMPER_2_NC_TRACE_SILK]  30.99,89.15 270 bottom
JP44  JUMPER-SMT_2_NC_TRACE_SILK  [SMT-JUMPER_2_NC_TRACE_SILK]  15.75,89.15 270 bottom
JP45  JUMPER-SMT_2_NC_TRACE_SILK  [SMT-JUMPER_2_NC_TRACE_SILK]  28.45,91.69 90 bottom
JP46  JUMPER-SMT_2_NC_TRACE_SILK  [SMT-JUMPER_2_NC_TRACE_SILK]  45.47,96.77 0 bottom
JP47  JUMPER-SMT_3_2-NC_TRACE_SILK  [SMT-JUMPER_3_2-NC_TRACE_SILK]  68.33,95.5 90 bottom
JP48  JUMPER-SMT_2_NC_TRACE_SILK  [SMT-JUMPER_2_NC_TRACE_SILK]  63.25,89.15 270 bottom
JP49  JUMPER-SMT_2_NC_TRACE_SILK  [SMT-JUMPER_2_NC_TRACE_SILK]  48.01,89.15 270 bottom
JP50  JUMPER-SMT_2_NC_TRACE_SILK  [SMT-JUMPER_2_NC_TRACE_SILK]  60.71,91.69 90 bottom
JP51  JUMPER-SMT_2_NC_TRACE_SILK  [SMT-JUMPER_2_NC_TRACE_SILK]  77.72,96.77 0 bottom
JP52  JUMPER-SMT_3_2-NC_TRACE_SILK  [SMT-JUMPER_3_2-NC_TRACE_SILK]  100.58,95.5 90 bottom
JP53  JUMPER-SMT_2_NC_TRACE_SILK  [SMT-JUMPER_2_NC_TRACE_SILK]  95.5,89.15 270 bottom
JP54  JUMPER-SMT_2_NC_TRACE_SILK  [SMT-JUMPER_2_NC_TRACE_SILK]  80.26,89.15 270 bottom
JP55  JUMPER-SMT_2_NC_TRACE_SILK  [SMT-JUMPER_2_NC_TRACE_SILK]  92.96,91.69 90 bottom
JP56  JUMPER-SMT_2_NC_TRACE_SILK  [SMT-JUMPER_2_NC_TRACE_SILK]  109.98,96.77 0 bottom
JP57  JUMPER-SMT_3_2-NC_TRACE_SILK  [SMT-JUMPER_3_2-NC_TRACE_SILK]  132.84,95.5 90 bottom
JP58  JUMPER-SMT_2_NC_TRACE_SILK  [SMT-JUMPER_2_NC_TRACE_SILK]  127.76,89.15 270 bottom
JP59  JUMPER-SMT_2_NC_TRACE_SILK  [SMT-JUMPER_2_NC_TRACE_SILK]  112.52,89.15 270 bottom
JP60  JUMPER-SMT_2_NC_TRACE_SILK  [SMT-JUMPER_2_NC_TRACE_SILK]  125.22,91.69 90 bottom
JP61  JUMPER-SMT_2_NC_TRACE_SILK  [SMT-JUMPER_2_NC_TRACE_SILK]  13.21,129.03 0 bottom
JP62  JUMPER-SMT_3_2-NC_TRACE_SILK  [SMT-JUMPER_3_2-NC_TRACE_SILK]  36.07,127.76 90 bottom
JP63  JUMPER-SMT_2_NC_TRACE_SILK  [SMT-JUMPER_2_NC_TRACE_SILK]  30.99,121.41 270 bottom
JP64  JUMPER-SMT_2_NC_TRACE_SILK  [SMT-JUMPER_2_NC_TRACE_SILK]  15.75,121.41 270 bottom
JP65  JUMPER-SMT_2_NC_TRACE_SILK  [SMT-JUMPER_2_NC_TRACE_SILK]  28.45,123.95 90 bottom
JP66  JUMPER-SMT_2_NC_TRACE_SILK  [SMT-JUMPER_2_NC_TRACE_SILK]  45.47,129.03 0 bottom
JP67  JUMPER-SMT_3_2-NC_TRACE_SILK  [SMT-JUMPER_3_2-NC_TRACE_SILK]  68.33,127.76 90 bottom
JP68  JUMPER-SMT_2_NC_TRACE_SILK  [SMT-JUMPER_2_NC_TRACE_SILK]  63.25,121.41 270 bottom
JP69  JUMPER-SMT_2_NC_TRACE_SILK  [SMT-JUMPER_2_NC_TRACE_SILK]  48.01,121.41 270 bottom
JP70  JUMPER-SMT_2_NC_TRACE_SILK  [SMT-JUMPER_2_NC_TRACE_SILK]  60.71,123.95 90 bottom
JP71  JUMPER-SMT_2_NC_TRACE_SILK  [SMT-JUMPER_2_NC_TRACE_SILK]  77.72,129.03 0 bottom
JP72  JUMPER-SMT_3_2-NC_TRACE_SILK  [SMT-JUMPER_3_2-NC_TRACE_SILK]  100.58,127.76 90 bottom
JP73  JUMPER-SMT_2_NC_TRACE_SILK  [SMT-JUMPER_2_NC_TRACE_SILK]  95.5,121.41 270 bottom
JP74  JUMPER-SMT_2_NC_TRACE_SILK  [SMT-JUMPER_2_NC_TRACE_SILK]  80.26,121.41 270 bottom
JP75  JUMPER-SMT_2_NC_TRACE_SILK  [SMT-JUMPER_2_NC_TRACE_SILK]  92.96,123.95 90 bottom
JP76  JUMPER-SMT_2_NC_TRACE_SILK  [SMT-JUMPER_2_NC_TRACE_SILK]  109.98,129.03 0 bottom
JP77  JUMPER-SMT_3_2-NC_TRACE_SILK  [SMT-JUMPER_3_2-NC_TRACE_SILK]  132.84,127.76 90 bottom
JP78  JUMPER-SMT_2_NC_TRACE_SILK  [SMT-JUMPER_2_NC_TRACE_SILK]  127.76,121.41 270 bottom
JP79  JUMPER-SMT_2_NC_TRACE_SILK  [SMT-JUMPER_2_NC_TRACE_SILK]  112.52,121.41 270 bottom
JP80  JUMPER-SMT_2_NC_TRACE_SILK  [SMT-JUMPER_2_NC_TRACE_SILK]  125.22,123.95 90 bottom
Q1  20V/4.2A/52mΩ/1.4W  [SOT23-3]  17.02,17.02 0 top
Q2  20V/4.2A/52mΩ/1.4W  [SOT23-3]  29.72,17.02 0 top
Q3  20V/4.2A/52mΩ/1.4W  [SOT23-3]  13.21,29.72 0 top
Q4  20V/4.2A/52mΩ/1.4W  [SOT23-3]  49.28,17.02 0 top
Q5  20V/4.2A/52mΩ/1.4W  [SOT23-3]  61.98,17.02 0 top
Q6  20V/4.2A/52mΩ/1.4W  [SOT23-3]  45.47,29.72 0 top
Q7  20V/4.2A/52mΩ/1.4W  [SOT23-3]  81.53,17.02 0 top
Q8  20V/4.2A/52mΩ/1.4W  [SOT23-3]  94.23,17.02 0 top
Q9  20V/4.2A/52mΩ/1.4W  [SOT23-3]  77.72,29.72 0 top
Q10  20V/4.2A/52mΩ/1.4W  [SOT23-3]  113.79,17.02 0 top
Q11  20V/4.2A/52mΩ/1.4W  [SOT23-3]  126.49,17.02 0 top
Q12  20V/4.2A/52mΩ/1.4W  [SOT23-3]  109.98,29.72 0 top
Q13  20V/4.2A/52mΩ/1.4W  [SOT23-3]  17.02,49.28 0 top
Q14  20V/4.2A/52mΩ/1.4W  [SOT23-3]  29.72,49.28 0 top
Q15  20V/4.2A/52mΩ/1.4W  [SOT23-3]  13.21,61.98 0 top
Q16  20V/4.2A/52mΩ/1.4W  [SOT23-3]  49.28,49.28 0 top
Q17  20V/4.2A/52mΩ/1.4W  [SOT23-3]  61.98,49.28 0 top
Q18  20V/4.2A/52mΩ/1.4W  [SOT23-3]  45.47,61.98 0 top
Q19  20V/4.2A/52mΩ/1.4W  [SOT23-3]  81.53,49.28 0 top
Q20  20V/4.2A/52mΩ/1.4W  [SOT23-3]  94.23,49.28 0 top
Q21  20V/4.2A/52mΩ/1.4W  [SOT23-3]  77.72,61.98 0 top
Q22  20V/4.2A/52mΩ/1.4W  [SOT23-3]  113.79,49.28 0 top
Q23  20V/4.2A/52mΩ/1.4W  [SOT23-3]  126.49,49.28 0 top
Q24  20V/4.2A/52mΩ/1.4W  [SOT23-3]  109.98,61.98 0 top
Q25  20V/4.2A/52mΩ/1.4W  [SOT23-3]  17.02,81.53 0 top
Q26  20V/4.2A/52mΩ/1.4W  [SOT23-3]  29.72,81.53 0 top
Q27  20V/4.2A/52mΩ/1.4W  [SOT23-3]  13.21,94.23 0 top
Q28  20V/4.2A/52mΩ/1.4W  [SOT23-3]  49.28,81.53 0 top
Q29  20V/4.2A/52mΩ/1.4W  [SOT23-3]  61.98,81.53 0 top
Q30  20V/4.2A/52mΩ/1.4W  [SOT23-3]  45.47,94.23 0 top
Q31  20V/4.2A/52mΩ/1.4W  [SOT23-3]  81.53,81.53 0 top
Q32  20V/4.2A/52mΩ/1.4W  [SOT23-3]  94.23,81.53 0 top
Q33  20V/4.2A/52mΩ/1.4W  [SOT23-3]  77.72,94.23 0 top
Q34  20V/4.2A/52mΩ/1.4W  [SOT23-3]  113.79,81.53 0 top
Q35  20V/4.2A/52mΩ/1.4W  [SOT23-3]  126.49,81.53 0 top
Q36  20V/4.2A/52mΩ/1.4W  [SOT23-3]  109.98,94.23 0 top
Q37  20V/4.2A/52mΩ/1.4W  [SOT23-3]  17.02,113.79 0 top
Q38  20V/4.2A/52mΩ/1.4W  [SOT23-3]  29.72,113.79 0 top
Q39  20V/4.2A/52mΩ/1.4W  [SOT23-3]  13.21,126.49 0 top
Q40  20V/4.2A/52mΩ/1.4W  [SOT23-3]  49.28,113.79 0 top
Q41  20V/4.2A/52mΩ/1.4W  [SOT23-3]  61.98,113.79 0 top
Q42  20V/4.2A/52mΩ/1.4W  [SOT23-3]  45.47,126.49 0 top
Q43  20V/4.2A/52mΩ/1.4W  [SOT23-3]  81.53,113.79 0 top
Q44  20V/4.2A/52mΩ/1.4W  [SOT23-3]  94.23,113.79 0 top
Q45  20V/4.2A/52mΩ/1.4W  [SOT23-3]  77.72,126.49 0 top
Q46  20V/4.2A/52mΩ/1.4W  [SOT23-3]  113.79,113.79 0 top
Q47  20V/4.2A/52mΩ/1.4W  [SOT23-3]  126.49,113.79 0 top
Q48  20V/4.2A/52mΩ/1.4W  [SOT23-3]  109.98,126.49 0 top
R1  2.2k  [0603]  32.26,32.26 180 top
R2  2.2k  [0603]  32.26,29.72 180 top
R3  1k  [0603]  13.21,33.53 180 top
R4  2.2k  [0603]  27.18,24.64 90 top
R5  2.2k  [0603]  17.02,33.53 270 top
R6  1k  [0603]  45.47,33.53 180 top
R7  2.2k  [0603]  64.52,32.26 180 top
R8  2.2k  [0603]  64.52,29.72 180 top
R9  2.2k  [0603]  59.44,24.64 90 top
R10  2.2k  [0603]  49.28,33.53 270 top
R11  1k  [0603]  77.72,33.53 180 top
R12  2.2k  [0603]  96.77,32.26 180 top
R13  2.2k  [0603]  96.77,29.72 180 top
R14  2.2k  [0603]  91.69,24.64 90 top
R15  2.2k  [0603]  81.53,33.53 270 top
R16  1k  [0603]  109.98,33.53 180 top
R17  2.2k  [0603]  129.03,32.26 180 top
R18  2.2k  [0603]  129.03,29.72 180 top
R19  2.2k  [0603]  123.95,24.64 90 top
R20  2.2k  [0603]  113.79,33.53 270 top
R21  1k  [0603]  13.21,65.79 180 top
R22  2.2k  [0603]  32.26,64.52 180 top
R23  2.2k  [0603]  32.26,61.98 180 top
R24  2.2k  [0603]  27.18,56.9 90 top
R25  2.2k  [0603]  17.02,65.79 270 top
R26  1k  [0603]  45.47,65.79 180 top
R27  2.2k  [0603]  64.52,64.52 180 top
R28  2.2k  [0603]  64.52,61.98 180 top
R29  2.2k  [0603]  59.44,56.9 90 top
R30  2.2k  [0603]  49.28,65.79 270 top
R31  1k  [0603]  77.72,65.79 180 top
R32  2.2k  [0603]  96.77,64.52 180 top
R33  2.2k  [0603]  96.77,61.98 180 top
R34  2.2k  [0603]  91.69,56.9 90 top
R35  2.2k  [0603]  81.53,65.79 270 top
R36  1k  [0603]  109.98,65.79 180 top
R37  2.2k  [0603]  129.03,64.52 180 top
R38  2.2k  [0603]  129.03,61.98 180 top
R39  2.2k  [0603]  123.95,56.9 90 top
R40  2.2k  [0603]  113.79,65.79 270 top
R41  1k  [0603]  13.21,98.04 180 top
R42  2.2k  [0603]  32.26,96.77 180 top
R43  2.2k  [0603]  32.26,94.23 180 top
R44  2.2k  [0603]  27.18,89.15 90 top
R45  2.2k  [0603]  17.02,98.04 270 top
R46  1k  [0603]  45.47,98.04 180 top
R47  2.2k  [0603]  64.52,96.77 180 top
R48  2.2k  [0603]  64.52,94.23 180 top
R49  2.2k  [0603]  59.44,89.15 90 top
R50  2.2k  [0603]  49.28,98.04 270 top
R51  1k  [0603]  77.72,98.04 180 top
R52  2.2k  [0603]  96.77,96.77 180 top
R53  2.2k  [0603]  96.77,94.23 180 top
R54  2.2k  [0603]  91.69,89.15 90 top
R55  2.2k  [0603]  81.53,98.04 270 top
R56  1k  [0603]  109.98,98.04 180 top
R57  2.2k  [0603]  129.03,96.77 180 top
R58  2.2k  [0603]  129.03,94.23 180 top
R59  2.2k  [0603]  123.95,89.15 90 top
R60  2.2k  [0603]  113.79,98.04 270 top
R61  1k  [0603]  13.21,130.3 180 top
R62  2.2k  [0603]  32.26,129.03 180 top
R63  2.2k  [0603]  32.26,126.49 180 top
R64  2.2k  [0603]  27.18,121.41 90 top
R65  2.2k  [0603]  17.02,130.3 270 top
R66  1k  [0603]  45.47,130.3 180 top
R67  2.2k  [0603]  64.52,129.03 180 top
R68  2.2k  [0603]  64.52,126.49 180 top
R69  2.2k  [0603]  59.44,121.41 90 top
R70  2.2k  [0603]  49.28,130.3 270 top
R71  1k  [0603]  77.72,130.3 180 top
R72  2.2k  [0603]  96.77,129.03 180 top
R73  2.2k  [0603]  96.77,126.49 180 top
R74  2.2k  [0603]  91.69,121.41 90 top
R75  2.2k  [0603]  81.53,130.3 270 top
R76  1k  [0603]  109.98,130.3 180 top
R77  2.2k  [0603]  129.03,129.03 180 top
R78  2.2k  [0603]  129.03,126.49 180 top
R79  2.2k  [0603]  123.95,121.41 90 top
R80  2.2k  [0603]  113.79,130.3 270 top
U1  AS7341OLGA  [OLGA8]  23.37,23.37 270 top
U2  PCA9536  [MSOP8]  23.37,17.02 0 top
U3  AP2127K-1.8V  [SOT23-5]  23.37,32.26 0 top
U4  AS7341OLGA  [OLGA8]  55.63,23.37 270 top
U5  PCA9536  [MSOP8]  55.63,17.02 0 top
U6  AP2127K-1.8V  [SOT23-5]  55.63,32.26 0 top
U7  AS7341OLGA  [OLGA8]  87.88,23.37 270 top
U8  PCA9536  [MSOP8]  87.88,17.02 0 top
U9  AP2127K-1.8V  [SOT23-5]  87.88,32.26 0 top
U10  AS7341OLGA  [OLGA8]  120.14,23.37 270 top
U11  PCA9536  [MSOP8]  120.14,17.02 0 top
U12  AP2127K-1.8V  [SOT23-5]  120.14,32.26 0 top
U13  AS7341OLGA  [OLGA8]  23.37,55.63 270 top
U14  PCA9536  [MSOP8]  23.37,49.28 0 top
U15  AP2127K-1.8V  [SOT23-5]  23.37,64.52 0 top
U16  AS7341OLGA  [OLGA8]  55.63,55.63 270 top
U17  PCA9536  [MSOP8]  55.63,49.28 0 top
U18  AP2127K-1.8V  [SOT23-5]  55.63,64.52 0 top
U19  AS7341OLGA  [OLGA8]  87.88,55.63 270 top
U20  PCA9536  [MSOP8]  87.88,49.28 0 top
U21  AP2127K-1.8V  [SOT23-5]  87.88,64.52 0 top
U22  AS7341OLGA  [OLGA8]  120.14,55.63 270 top
U23  PCA9536  [MSOP8]  120.14,49.28 0 top
U24  AP2127K-1.8V  [SOT23-5]  120.14,64.52 0 top
U25  AS7341OLGA  [OLGA8]  23.37,87.88 270 top
U26  PCA9536  [MSOP8]  23.37,81.53 0 top
U27  AP2127K-1.8V  [SOT23-5]  23.37,96.77 0 top
U28  AS7341OLGA  [OLGA8]  55.63,87.88 270 top
U29  PCA9536  [MSOP8]  55.63,81.53 0 top
U30  AP2127K-1.8V  [SOT23-5]  55.63,96.77 0 top
U31  AS7341OLGA  [OLGA8]  87.88,87.88 270 top
U32  PCA9536  [MSOP8]  87.88,81.53 0 top
U33  AP2127K-1.8V  [SOT23-5]  87.88,96.77 0 top
U34  AS7341OLGA  [OLGA8]  120.14,87.88 270 top
U35  PCA9536  [MSOP8]  120.14,81.53 0 top
U36  AP2127K-1.8V  [SOT23-5]  120.14,96.77 0 top
U37  AS7341OLGA  [OLGA8]  23.37,120.14 270 top
U38  PCA9536  [MSOP8]  23.37,113.79 0 top
U39  AP2127K-1.8V  [SOT23-5]  23.37,129.03 0 top
U40  AS7341OLGA  [OLGA8]  55.63,120.14 270 top
U41  PCA9536  [MSOP8]  55.63,113.79 0 top
U42  AP2127K-1.8V  [SOT23-5]  55.63,129.03 0 top
U43  AS7341OLGA  [OLGA8]  87.88,120.14 270 top
U44  PCA9536  [MSOP8]  87.88,113.79 0 top
U45  AP2127K-1.8V  [SOT23-5]  87.88,129.03 0 top
U46  AS7341OLGA  [OLGA8]  120.14,120.14 270 top
U47  PCA9536  [MSOP8]  120.14,113.79 0 top
U48  AP2127K-1.8V  [SOT23-5]  120.14,129.03 0 top
U$1  OSHW-LOGOS  [OSHW-LOGO-S]  13.97,8.64 0 top
U$2  [QWIIC_6MM]  35.43,17.91 0 top
U$3  [QWIIC0]  14.48,37.21 0 top
U$4  [QWIIC0]  32.13,37.21 0 bottom
U$5  [SPECTRAL0]  19.3,37.21 0 top
U$6  [SPARKX-SMALL]  11.94,14.48 0 top
U$7  [SPARKX-SMALL]  11.94,14.48 0 bottom
U$8  [SPECTRAL0]  26.92,37.21 0 bottom
U$9  [#I2C#0]  35.31,30.99 0 bottom
U$10  [#PWR#0]  12.32,32.26 0 bottom
U$11  [SENSOR0]  26.29,37.21 0 top
U$12  [PWR0]  6.86,32.26 0 top
U$13  [#GND#0]  17.02,8.51 90 top
U$14  [#GND#0]  17.02,8.51 90 bottom
U$15  [#3#3V#0]  19.56,8.51 90 top
U$16  [#3#3V#0]  19.56,8.51 90 bottom
U$17  [#SDA#0]  22.1,8.51 90 top
U$18  [#SDA#0]  22.1,8.51 90 bottom
U$19  [#SCL#0]  24.64,8.51 90 top
U$20  [#SCL#0]  24.64,8.51 90 bottom
U$21  [SENSOR0]  19.81,37.21 0 bottom
U$22  [AS73410]  19.56,35.69 0 top
U$23  [AS73410]  26.29,35.69 0 bottom
U$24  [##INT##0]  27.18,8.64 90 top
U$25  [##INT##0]  27.18,8.64 90 bottom
U$26  [#GPIO#0]  29.72,8.64 90 top
U$27  [#GPIO#0]  29.72,8.64 90 bottom
U$28  [#IR#0]  15.11,24.64 0 bottom
U$29  [#WHITE#0]  30.35,24.64 0 bottom
U$30  [##INT##0]  27.81,27.18 0 bottom
U$31  OSHW-LOGOS  [OSHW-LOGO-S]  46.23,8.64 0 top
U$32  [QWIIC_6MM]  67.69,17.91 0 top
U$33  [PWR0]  39.12,32.26 0 top
U$34  [#PWR#0]  44.58,32.26 0 bottom
U$35  [#I2C#0]  67.56,30.99 0 bottom
U$36  [#GND#0]  49.28,8.51 90 top
U$37  [#GND#0]  49.28,8.51 90 bottom
U$38  [#3#3V#0]  51.82,8.51 90 top
U$39  [#3#3V#0]  51.82,8.51 90 bottom
U$40  [#SDA#0]  54.36,8.51 90 top
U$41  [#SDA#0]  54.36,8.51 90 bottom
U$42  [#SCL#0]  56.9,8.51 90 top
U$43  [#SCL#0]  56.9,8.51 90 bottom
U$44  [SPARKX-SMALL]  44.2,14.48 0 top
U$45  [SPARKX-SMALL]  44.2,14.48 0 bottom
U$46  [QWIIC0]  46.74,37.21 0 top
U$47  [QWIIC0]  64.39,37.21 0 bottom
U$48  [SPECTRAL0]  51.56,37.21 0 top
U$49  [SPECTRAL0]  59.18,37.21 0 bottom
U$50  [SENSOR0]  58.55,37.21 0 top
U$51  [SENSOR0]  52.07,37.21 0 bottom
U$52  [AS73410]  51.82,35.69 0 top
U$53  [AS73410]  58.55,35.69 0 bottom
U$54  [#IR#0]  47.37,24.64 0 bottom
U$55  [#WHITE#0]  62.61,24.64 0 bottom
U$56  [##INT##0]  60.07,27.18 0 bottom
U$57  [##INT##0]  59.44,8.64 90 top
U$58  [##INT##0]  59.44,8.64 90 bottom
U$59  [#GPIO#0]  61.98,8.64 90 top
U$60  [#GPIO#0]  61.98,8.64 90 bottom
U$61  OSHW-LOGOS  [OSHW-LOGO-S]  78.49,8.64 0 top
U$62  [QWIIC_6MM]  99.95,17.91 0 top
U$63  [PWR0]  71.37,32.26 0 top
U$64  [#PWR#0]  76.84,32.26 0 bottom
U$65  [#I2C#0]  99.82,30.99 0 bottom
U$66  [#GND#0]  81.53,8.51 90 top
U$67  [#GND#0]  81.53,8.51 90 bottom
U$68  [#3#3V#0]  84.07,8.51 90 top
U$69  [#3#3V#0]  84.07,8.51 90 bottom
U$70  [#SDA#0]  86.61,8.51 90 top
U$71  [#SDA#0]  86.61,8.51 90 bottom
U$72  [#SCL#0]  89.15,8.51 90 top
U$73  [#SCL#0]  89.15,8.51 90 bottom
U$74  [SPARKX-SMALL]  76.45,14.48 0 top
U$75  [SPARKX-SMALL]  76.45,14.48 0 bottom
U$76  [QWIIC0]  78.99,37.21 0 top
U$77  [QWIIC0]  96.65,37.21 0 bottom
U$78  [SPECTRAL0]  83.82,37.21 0 top
U$79  [SPECTRAL0]  91.44,37.21 0 bottom
U$80  [SENSOR0]  90.81,37.21 0 top
U$81  [SENSOR0]  84.33,37.21 0 bottom
U$82  [AS73410]  84.07,35.69 0 top
U$83  [AS73410]  90.81,35.69 0 bottom
U$84  [#IR#0]  79.63,24.64 0 bottom
U$85  [#WHITE#0]  94.87,24.64 0 bottom
U$86  [##INT##0]  92.33,27.18 0 bottom
U$87  [##INT##0]  91.69,8.64 90 top
U$88  [##INT##0]  91.69,8.64 90 bottom
U$89  [#GPIO#0]  94.23,8.64 90 top
U$90  [#GPIO#0]  94.23,8.64 90 bottom
U$91  OSHW-LOGOS  [OSHW-LOGO-S]  110.74,8.64 0 top
U$92  [QWIIC_6MM]  132.21,17.91 0 top
U$93  [PWR0]  103.63,32.26 0 top
U$94  [#PWR#0]  109.09,32.26 0 bottom
U$95  [#I2C#0]  132.08,30.99 0 bottom
U$96  [#GND#0]  113.79,8.51 90 top
U$97  [#GND#0]  113.79,8.51 90 bottom
U$98  [#3#3V#0]  116.33,8.51 90 top
U$99  [#3#3V#0]  116.33,8.51 90 bottom
U$100  [#SDA#0]  118.87,8.51 90 top
U$101  [#SDA#0]  118.87,8.51 90 bottom
U$102  [#SCL#0]  121.41,8.51 90 top
U$103  [#SCL#0]  121.41,8.51 90 bottom
U$104  [SPARKX-SMALL]  108.71,14.48 0 top
U$105  [SPARKX-SMALL]  108.71,14.48 0 bottom
U$106  [QWIIC0]  111.25,37.21 0 top
U$107  [QWIIC0]  128.91,37.21 0 bottom
U$108  [SPECTRAL0]  116.08,37.21 0 top
U$109  [SPECTRAL0]  123.7,37.21 0 bottom
U$110  [SENSOR0]  123.06,37.21 0 top
U$111  [SENSOR0]  116.59,37.21 0 bottom
U$112  [AS73410]  116.33,35.69 0 top
U$113  [AS73410]  123.06,35.69 0 bottom
U$114  [#IR#0]  111.89,24.64 0 bottom
U$115  [#WHITE#0]  127.13,24.64 0 bottom
U$116  [##INT##0]  124.59,27.18 0 bottom
U$117  [##INT##0]  123.95,8.64 90 top
U$118  [##INT##0]  123.95,8.64 90 bottom
U$119  [#GPIO#0]  126.49,8.64 90 top
U$120  [#GPIO#0]  126.49,8.64 90 bottom
U$121  OSHW-LOGOS  [OSHW-LOGO-S]  13.97,40.89 0 top
U$122  [QWIIC_6MM]  35.43,50.16 0 top
U$123  [PWR0]  6.86,64.52 0 top
U$124  [#PWR#0]  12.32,64.52 0 bottom
U$125  [#I2C#0]  35.31,63.25 0 bottom
U$126  [#GND#0]  17.02,40.77 90 top
U$127  [#GND#0]  17.02,40.77 90 bottom
U$128  [#3#3V#0]  19.56,40.77 90 top
U$129  [#3#3V#0]  19.56,40.77 90 bottom
U$130  [#SDA#0]  22.1,40.77 90 top
U$131  [#SDA#0]  22.1,40.77 90 bottom
U$132  [#SCL#0]  24.64,40.77 90 top
U$133  [#SCL#0]  24.64,40.77 90 bottom
U$134  [SPARKX-SMALL]  11.94,46.74 0 top
U$135  [SPARKX-SMALL]  11.94,46.74 0 bottom
U$136  [QWIIC0]  14.48,69.47 0 top
U$137  [QWIIC0]  32.13,69.47 0 bottom
U$138  [SPECTRAL0]  19.3,69.47 0 top
U$139  [SPECTRAL0]  26.92,69.47 0 bottom
U$140  [SENSOR0]  26.29,69.47 0 top
U$141  [SENSOR0]  19.81,69.47 0 bottom
U$142  [AS73410]  19.56,67.95 0 top
U$143  [AS73410]  26.29,67.95 0 bottom
U$144  [#IR#0]  15.11,56.9 0 bottom
U$145  [#WHITE#0]  30.35,56.9 0 bottom
U$146  [##INT##0]  27.81,59.44 0 bottom
U$147  [##INT##0]  27.18,40.89 90 top
U$148  [##INT##0]  27.18,40.89 90 bottom
U$149  [#GPIO#0]  29.72,40.89 90 top
U$150  [#GPIO#0]  29.72,40.89 90 bottom
U$151  OSHW-LOGOS  [OSHW-LOGO-S]  46.23,40.89 0 top
U$152  [QWIIC_6MM]  67.69,50.16 0 top
U$153  [PWR0]  39.12,64.52 0 top
U$154  [#PWR#0]  44.58,64.52 0 bottom
U$155  [#I2C#0]  67.56,63.25 0 bottom
U$156  [#GND#0]  49.28,40.77 90 top
U$157  [#GND#0]  49.28,40.77 90 bottom
U$158  [#3#3V#0]  51.82,40.77 90 top
U$159  [#3#3V#0]  51.82,40.77 90 bottom
U$160  [#SDA#0]  54.36,40.77 90 top
U$161  [#SDA#0]  54.36,40.77 90 bottom
U$162  [#SCL#0]  56.9,40.77 90 top
U$163  [#SCL#0]  56.9,40.77 90 bottom
U$164  [SPARKX-SMALL]  44.2,46.74 0 top
U$165  [SPARKX-SMALL]  44.2,46.74 0 bottom
U$166  [QWIIC0]  46.74,69.47 0 top
U$167  [QWIIC0]  64.39,69.47 0 bottom
U$168  [SPECTRAL0]  51.56,69.47 0 top
U$169  [SPECTRAL0]  59.18,69.47 0 bottom
U$170  [SENSOR0]  58.55,69.47 0 top
U$171  [SENSOR0]  52.07,69.47 0 bottom
U$172  [AS73410]  51.82,67.95 0 top
U$173  [AS73410]  58.55,67.95 0 bottom
U$174  [#IR#0]  47.37,56.9 0 bottom
U$175  [#WHITE#0]  62.61,56.9 0 bottom
U$176  [##INT##0]  60.07,59.44 0 bottom
U$177  [##INT##0]  59.44,40.89 90 top
U$178  [##INT##0]  59.44,40.89 90 bottom
U$179  [#GPIO#0]  61.98,40.89 90 top
U$180  [#GPIO#0]  61.98,40.89 90 bottom
U$181  OSHW-LOGOS  [OSHW-LOGO-S]  78.49,40.89 0 top
U$182  [QWIIC_6MM]  99.95,50.16 0 top
U$183  [PWR0]  71.37,64.52 0 top
U$184  [#PWR#0]  76.84,64.52 0 bottom
U$185  [#I2C#0]  99.82,63.25 0 bottom
U$186  [#GND#0]  81.53,40.77 90 top
U$187  [#GND#0]  81.53,40.77 90 bottom
U$188  [#3#3V#0]  84.07,40.77 90 top
U$189  [#3#3V#0]  84.07,40.77 90 bottom
U$190  [#SDA#0]  86.61,40.77 90 top
U$191  [#SDA#0]  86.61,40.77 90 bottom
U$192  [#SCL#0]  89.15,40.77 90 top
U$193  [#SCL#0]  89.15,40.77 90 bottom
U$194  [SPARKX-SMALL]  76.45,46.74 0 top
U$195  [SPARKX-SMALL]  76.45,46.74 0 bottom
U$196  [QWIIC0]  78.99,69.47 0 top
U$197  [QWIIC0]  96.65,69.47 0 bottom
U$198  [SPECTRAL0]  83.82,69.47 0 top
U$199  [SPECTRAL0]  91.44,69.47 0 bottom
U$200  [SENSOR0]  90.81,69.47 0 top
U$201  [SENSOR0]  84.33,69.47 0 bottom
U$202  [AS73410]  84.07,67.95 0 top
U$203  [AS73410]  90.81,67.95 0 bottom
U$204  [#IR#0]  79.63,56.9 0 bottom
U$205  [#WHITE#0]  94.87,56.9 0 bottom
U$206  [##INT##0]  92.33,59.44 0 bottom
U$207  [##INT##0]  91.69,40.89 90 top
U$208  [##INT##0]  91.69,40.89 90 bottom
U$209  [#GPIO#0]  94.23,40.89 90 top
U$210  [#GPIO#0]  94.23,40.89 90 bottom
U$211  OSHW-LOGOS  [OSHW-LOGO-S]  110.74,40.89 0 top
U$212  [QWIIC_6MM]  132.21,50.16 0 top
U$213  [PWR0]  103.63,64.52 0 top
U$214  [#PWR#0]  109.09,64.52 0 bottom
U$215  [#I2C#0]  132.08,63.25 0 bottom
U$216  [#GND#0]  113.79,40.77 90 top
U$217  [#GND#0]  113.79,40.77 90 bottom
U$218  [#3#3V#0]  116.33,40.77 90 top
U$219  [#3#3V#0]  116.33,40.77 90 bottom
U$220  [#SDA#0]  118.87,40.77 90 top
U$221  [#SDA#0]  118.87,40.77 90 bottom
U$222  [#SCL#0]  121.41,40.77 90 top
U$223  [#SCL#0]  121.41,40.77 90 bottom
U$224  [SPARKX-SMALL]  108.71,46.74 0 top
U$225  [SPARKX-SMALL]  108.71,46.74 0 bottom
U$226  [QWIIC0]  111.25,69.47 0 top
U$227  [QWIIC0]  128.91,69.47 0 bottom
U$228  [SPECTRAL0]  116.08,69.47 0 top
U$229  [SPECTRAL0]  123.7,69.47 0 bottom
U$230  [SENSOR0]  123.06,69.47 0 top
U$231  [SENSOR0]  116.59,69.47 0 bottom
U$232  [AS73410]  116.33,67.95 0 top
U$233  [AS73410]  123.06,67.95 0 bottom
U$234  [#IR#0]  111.89,56.9 0 bottom
U$235  [#WHITE#0]  127.13,56.9 0 bottom
U$236  [##INT##0]  124.59,59.44 0 bottom
U$237  [##INT##0]  123.95,40.89 90 top
U$238  [##INT##0]  123.95,40.89 90 bottom
U$239  [#GPIO#0]  126.49,40.89 90 top
U$240  [#GPIO#0]  126.49,40.89 90 bottom
U$241  OSHW-LOGOS  [OSHW-LOGO-S]  13.97,73.15 0 top
U$242  [QWIIC_6MM]  35.43,82.42 0 top
U$243  [PWR0]  6.86,96.77 0 top
U$244  [#PWR#0]  12.32,96.77 0 bottom
U$245  [#I2C#0]  35.31,95.5 0 bottom
U$246  [#GND#0]  17.02,73.03 90 top
U$247  [#GND#0]  17.02,73.03 90 bottom
U$248  [#3#3V#0]  19.56,73.03 90 top
U$249  [#3#3V#0]  19.56,73.03 90 bottom
U$250  [#SDA#0]  22.1,73.03 90 top
U$251  [#SDA#0]  22.1,73.03 90 bottom
U$252  [#SCL#0]  24.64,73.03 90 top
U$253  [#SCL#0]  24.64,73.03 90 bottom
U$254  [SPARKX-SMALL]  11.94,78.99 0 top
U$255  [SPARKX-SMALL]  11.94,78.99 0 bottom
U$256  [QWIIC0]  14.48,101.73 0 top
U$257  [QWIIC0]  32.13,101.73 0 bottom
U$258  [SPECTRAL0]  19.3,101.73 0 top
U$259  [SPECTRAL0]  26.92,101.73 0 bottom
U$260  [SENSOR0]  26.29,101.73 0 top
U$261  [SENSOR0]  19.81,101.73 0 bottom
U$262  [AS73410]  19.56,100.2 0 top
U$263  [AS73410]  26.29,100.2 0 bottom
U$264  [#IR#0]  15.11,89.15 0 bottom
U$265  [#WHITE#0]  30.35,89.15 0 bottom
U$266  [##INT##0]  27.81,91.69 0 bottom
U$267  [##INT##0]  27.18,73.15 90 top
U$268  [##INT##0]  27.18,73.15 90 bottom
U$269  [#GPIO#0]  29.72,73.15 90 top
U$270  [#GPIO#0]  29.72,73.15 90 bottom
U$271  OSHW-LOGOS  [OSHW-LOGO-S]  46.23,73.15 0 top
U$272  [QWIIC_6MM]  67.69,82.42 0 top
U$273  [PWR0]  39.12,96.77 0 top
U$274  [#PWR#0]  44.58,96.77 0 bottom
U$275  [#I2C#0]  67.56,95.5 0 bottom
U$276  [#GND#0]  49.28,73.03 90 top
U$277  [#GND#0]  49.28,73.03 90 bottom
U$278  [#3#3V#0]  51.82,73.03 90 top
U$279  [#3#3V#0]  51.82,73.03 90 bottom
U$280  [#SDA#0]  54.36,73.03 90 top
U$281  [#SDA#0]  54.36,73.03 90 bottom
U$282  [#SCL#0]  56.9,73.03 90 top
U$283  [#SCL#0]  56.9,73.03 90 bottom
U$284  [SPARKX-SMALL]  44.2,78.99 0 top
U$285  [SPARKX-SMALL]  44.2,78.99 0 bottom
U$286  [QWIIC0]  46.74,101.73 0 top
U$287  [QWIIC0]  64.39,101.73 0 bottom
U$288  [SPECTRAL0]  51.56,101.73 0 top
U$289  [SPECTRAL0]  59.18,101.73 0 bottom
U$290  [SENSOR0]  58.55,101.73 0 top
U$291  [SENSOR0]  52.07,101.73 0 bottom
U$292  [AS73410]  51.82,100.2 0 top
U$293  [AS73410]  58.55,100.2 0 bottom
U$294  [#IR#0]  47.37,89.15 0 bottom
U$295  [#WHITE#0]  62.61,89.15 0 bottom
U$296  [##INT##0]  60.07,91.69 0 bottom
U$297  [##INT##0]  59.44,73.15 90 top
U$298  [##INT##0]  59.44,73.15 90 bottom
U$299  [#GPIO#0]  61.98,73.15 90 top
U$300  [#GPIO#0]  61.98,73.15 90 bottom
U$301  OSHW-LOGOS  [OSHW-LOGO-S]  78.49,73.15 0 top
U$302  [QWIIC_6MM]  99.95,82.42 0 top
U$303  [PWR0]  71.37,96.77 0 top
U$304  [#PWR#0]  76.84,96.77 0 bottom
U$305  [#I2C#0]  99.82,95.5 0 bottom
U$306  [#GND#0]  81.53,73.03 90 top
U$307  [#GND#0]  81.53,73.03 90 bottom
U$308  [#3#3V#0]  84.07,73.03 90 top
U$309  [#3#3V#0]  84.07,73.03 90 bottom
U$310  [#SDA#0]  86.61,73.03 90 top
U$311  [#SDA#0]  86.61,73.03 90 bottom
U$312  [#SCL#0]  89.15,73.03 90 top
U$313  [#SCL#0]  89.15,73.03 90 bottom
U$314  [SPARKX-SMALL]  76.45,78.99 0 top
U$315  [SPARKX-SMALL]  76.45,78.99 0 bottom
U$316  [QWIIC0]  78.99,101.73 0 top
U$317  [QWIIC0]  96.65,101.73 0 bottom
U$318  [SPECTRAL0]  83.82,101.73 0 top
U$319  [SPECTRAL0]  91.44,101.73 0 bottom
U$320  [SENSOR0]  90.81,101.73 0 top
U$321  [SENSOR0]  84.33,101.73 0 bottom
U$322  [AS73410]  84.07,100.2 0 top
U$323  [AS73410]  90.81,100.2 0 bottom
U$324  [#IR#0]  79.63,89.15 0 bottom
U$325  [#WHITE#0]  94.87,89.15 0 bottom
U$326  [##INT##0]  92.33,91.69 0 bottom
U$327  [##INT##0]  91.69,73.15 90 top
U$328  [##INT##0]  91.69,73.15 90 bottom
U$329  [#GPIO#0]  94.23,73.15 90 top
U$330  [#GPIO#0]  94.23,73.15 90 bottom
U$331  OSHW-LOGOS  [OSHW-LOGO-S]  110.74,73.15 0 top
U$332  [QWIIC_6MM]  132.21,82.42 0 top
U$333  [PWR0]  103.63,96.77 0 top
U$334  [#PWR#0]  109.09,96.77 0 bottom
U$335  [#I2C#0]  132.08,95.5 0 bottom
U$336  [#GND#0]  113.79,73.03 90 top
U$337  [#GND#0]  113.79,73.03 90 bottom
U$338  [#3#3V#0]  116.33,73.03 90 top
U$339  [#3#3V#0]  116.33,73.03 90 bottom
U$340  [#SDA#0]  118.87,73.03 90 top
U$341  [#SDA#0]  118.87,73.03 90 bottom
U$342  [#SCL#0]  121.41,73.03 90 top
U$343  [#SCL#0]  121.41,73.03 90 bottom
U$344  [SPARKX-SMALL]  108.71,78.99 0 top
U$345  [SPARKX-SMALL]  108.71,78.99 0 bottom
U$346  [QWIIC0]  111.25,101.73 0 top
U$347  [QWIIC0]  128.91,101.73 0 bottom
U$348  [SPECTRAL0]  116.08,101.73 0 top
U$349  [SPECTRAL0]  123.7,101.73 0 bottom
U$350  [SENSOR0]  123.06,101.73 0 top
U$351  [SENSOR0]  116.59,101.73 0 bottom
U$352  [AS73410]  116.33,100.2 0 top
U$353  [AS73410]  123.06,100.2 0 bottom
U$354  [#IR#0]  111.89,89.15 0 bottom
U$355  [#WHITE#0]  127.13,89.15 0 bottom
U$356  [##INT##0]  124.59,91.69 0 bottom
U$357  [##INT##0]  123.95,73.15 90 top
U$358  [##INT##0]  123.95,73.15 90 bottom
U$359  [#GPIO#0]  126.49,73.15 90 top
U$360  [#GPIO#0]  126.49,73.15 90 bottom
U$361  OSHW-LOGOS  [OSHW-LOGO-S]  13.97,105.41 0 top
U$362  [QWIIC_6MM]  35.43,114.68 0 top
U$363  [PWR0]  6.86,129.03 0 top
U$364  [#PWR#0]  12.32,129.03 0 bottom
U$365  [#I2C#0]  35.31,127.76 0 bottom
U$366  [#GND#0]  17.02,105.28 90 top
U$367  [#GND#0]  17.02,105.28 90 bottom
U$368  [#3#3V#0]  19.56,105.28 90 top
U$369  [#3#3V#0]  19.56,105.28 90 bottom
U$370  [#SDA#0]  22.1,105.28 90 top
U$371  [#SDA#0]  22.1,105.28 90 bottom
U$372  [#SCL#0]  24.64,105.28 90 top
U$373  [#SCL#0]  24.64,105.28 90 bottom
U$374  [SPARKX-SMALL]  11.94,111.25 0 top
U$375  [SPARKX-SMALL]  11.94,111.25 0 bottom
U$376  [QWIIC0]  14.48,133.98 0 top
U$377  [QWIIC0]  32.13,133.98 0 bottom
U$378  [SPECTRAL0]  19.3,133.98 0 top
U$379  [SPECTRAL0]  26.92,133.98 0 bottom
U$380  [SENSOR0]  26.29,133.98 0 top
U$381  [SENSOR0]  19.81,133.98 0 bottom
U$382  [AS73410]  19.56,132.46 0 top
U$383  [AS73410]  26.29,132.46 0 bottom
U$384  [#IR#0]  15.11,121.41 0 bottom
U$385  [#WHITE#0]  30.35,121.41 0 bottom
U$386  [##INT##0]  27.81,123.95 0 bottom
U$387  [##INT##0]  27.18,105.41 90 top
U$388  [##INT##0]  27.18,105.41 90 bottom
U$389  [#GPIO#0]  29.72,105.41 90 top
U$390  [#GPIO#0]  29.72,105.41 90 bottom
U$391  OSHW-LOGOS  [OSHW-LOGO-S]  46.23,105.41 0 top
U$392  [QWIIC_6MM]  67.69,114.68 0 top
U$393  [PWR0]  39.12,129.03 0 top
U$394  [#PWR#0]  44.58,129.03 0 bottom
U$395  [#I2C#0]  67.56,127.76 0 bottom
U$396  [#GND#0]  49.28,105.28 90 top
U$397  [#GND#0]  49.28,105.28 90 bottom
U$398  [#3#3V#0]  51.82,105.28 90 top
U$399  [#3#3V#0]  51.82,105.28 90 bottom
U$400  [#SDA#0]  54.36,105.28 90 top
U$401  [#SDA#0]  54.36,105.28 90 bottom
U$402  [#SCL#0]  56.9,105.28 90 top
U$403  [#SCL#0]  56.9,105.28 90 bottom
U$404  [SPARKX-SMALL]  44.2,111.25 0 top
U$405  [SPARKX-SMALL]  44.2,111.25 0 bottom
U$406  [QWIIC0]  46.74,133.98 0 top
U$407  [QWIIC0]  64.39,133.98 0 bottom
U$408  [SPECTRAL0]  51.56,133.98 0 top
U$409  [SPECTRAL0]  59.18,133.98 0 bottom
U$410  [SENSOR0]  58.55,133.98 0 top
U$411  [SENSOR0]  52.07,133.98 0 bottom
U$412  [AS73410]  51.82,132.46 0 top
U$413  [AS73410]  58.55,132.46 0 bottom
U$414  [#IR#0]  47.37,121.41 0 bottom
U$415  [#WHITE#0]  62.61,121.41 0 bottom
U$416  [##INT##0]  60.07,123.95 0 bottom
U$417  [##INT##0]  59.44,105.41 90 top
U$418  [##INT##0]  59.44,105.41 90 bottom
U$419  [#GPIO#0]  61.98,105.41 90 top
U$420  [#GPIO#0]  61.98,105.41 90 bottom
U$421  OSHW-LOGOS  [OSHW-LOGO-S]  78.49,105.41 0 top
U$422  [QWIIC_6MM]  99.95,114.68 0 top
U$423  [PWR0]  71.37,129.03 0 top
U$424  [#PWR#0]  76.84,129.03 0 bottom
U$425  [#I2C#0]  99.82,127.76 0 bottom
U$426  [#GND#0]  81.53,105.28 90 top
U$427  [#GND#0]  81.53,105.28 90 bottom
U$428  [#3#3V#0]  84.07,105.28 90 top
U$429  [#3#3V#0]  84.07,105.28 90 bottom
U$430  [#SDA#0]  86.61,105.28 90 top
U$431  [#SDA#0]  86.61,105.28 90 bottom
U$432  [#SCL#0]  89.15,105.28 90 top
U$433  [#SCL#0]  89.15,105.28 90 bottom
U$434  [SPARKX-SMALL]  76.45,111.25 0 top